# Allegro board JN516X_0V1_5x5.brd
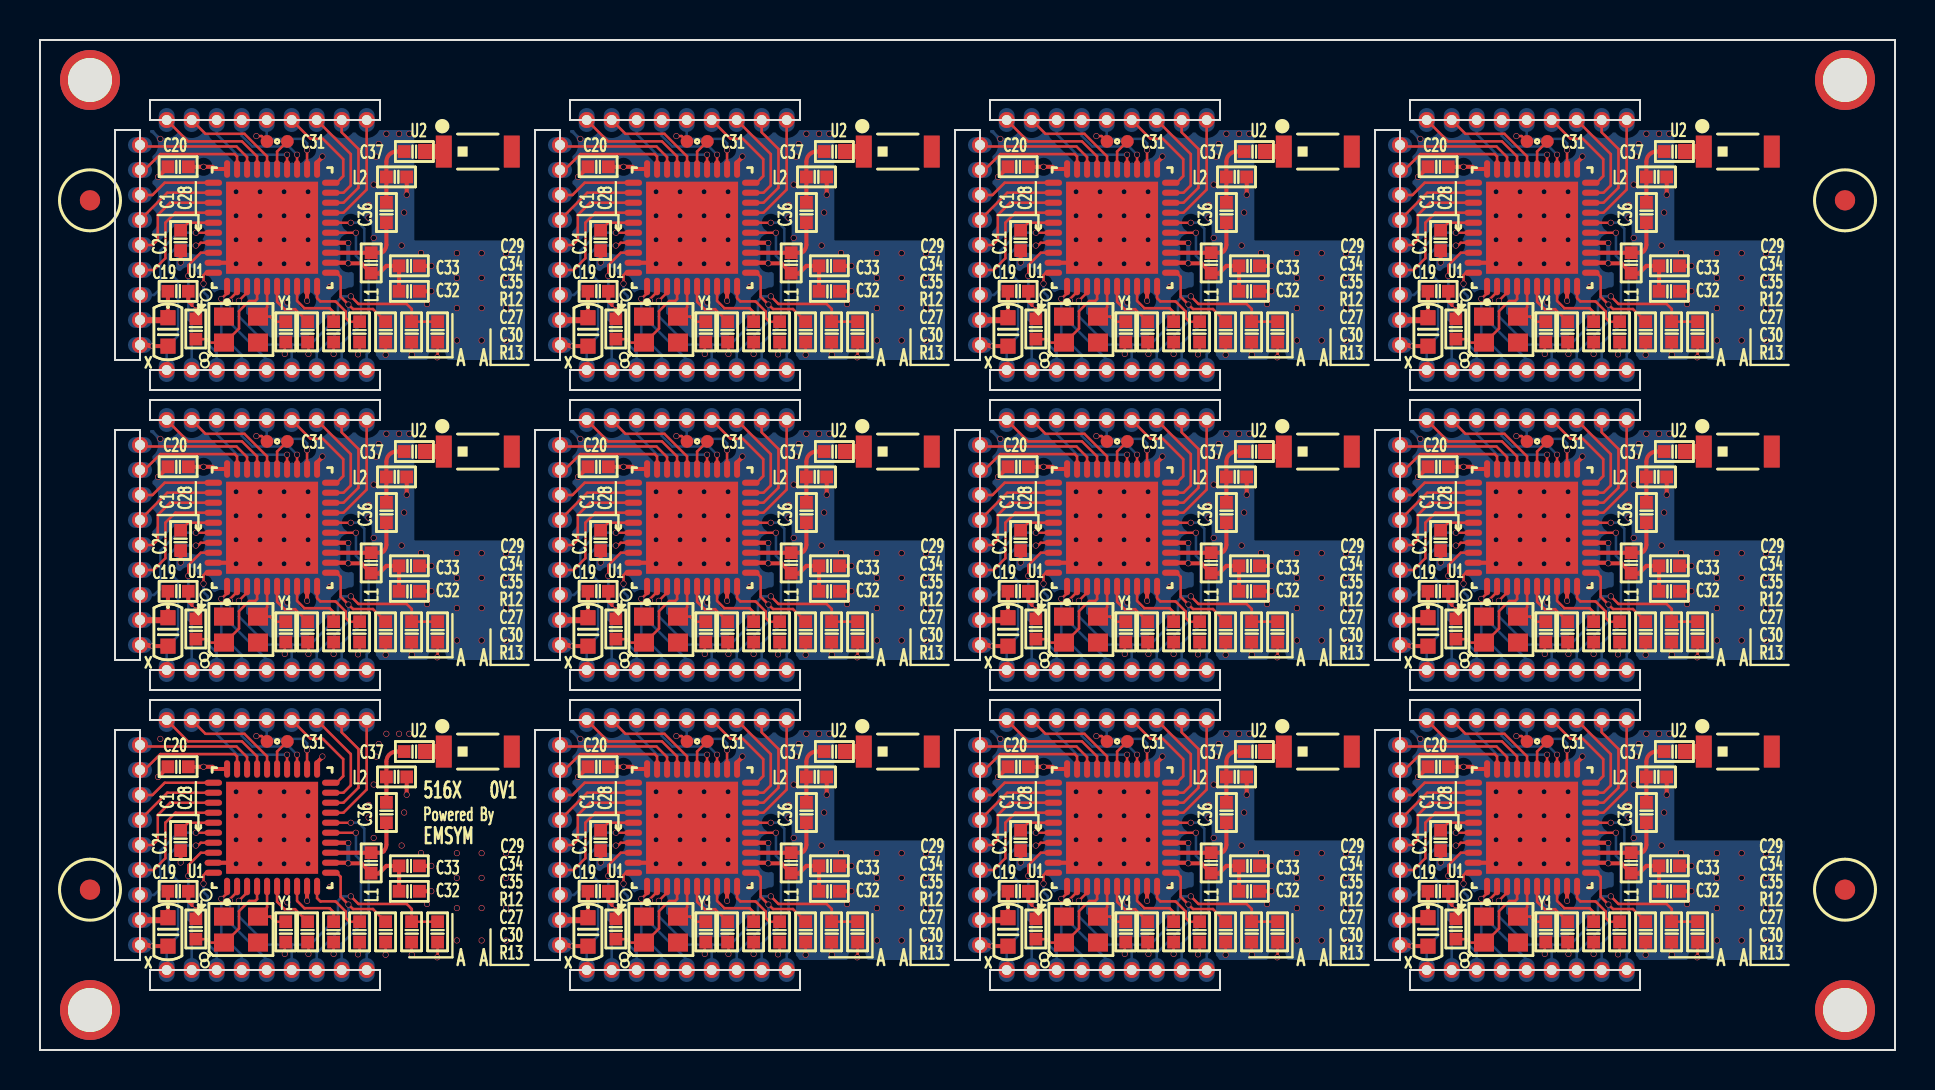
[diagram p0: board, top side]
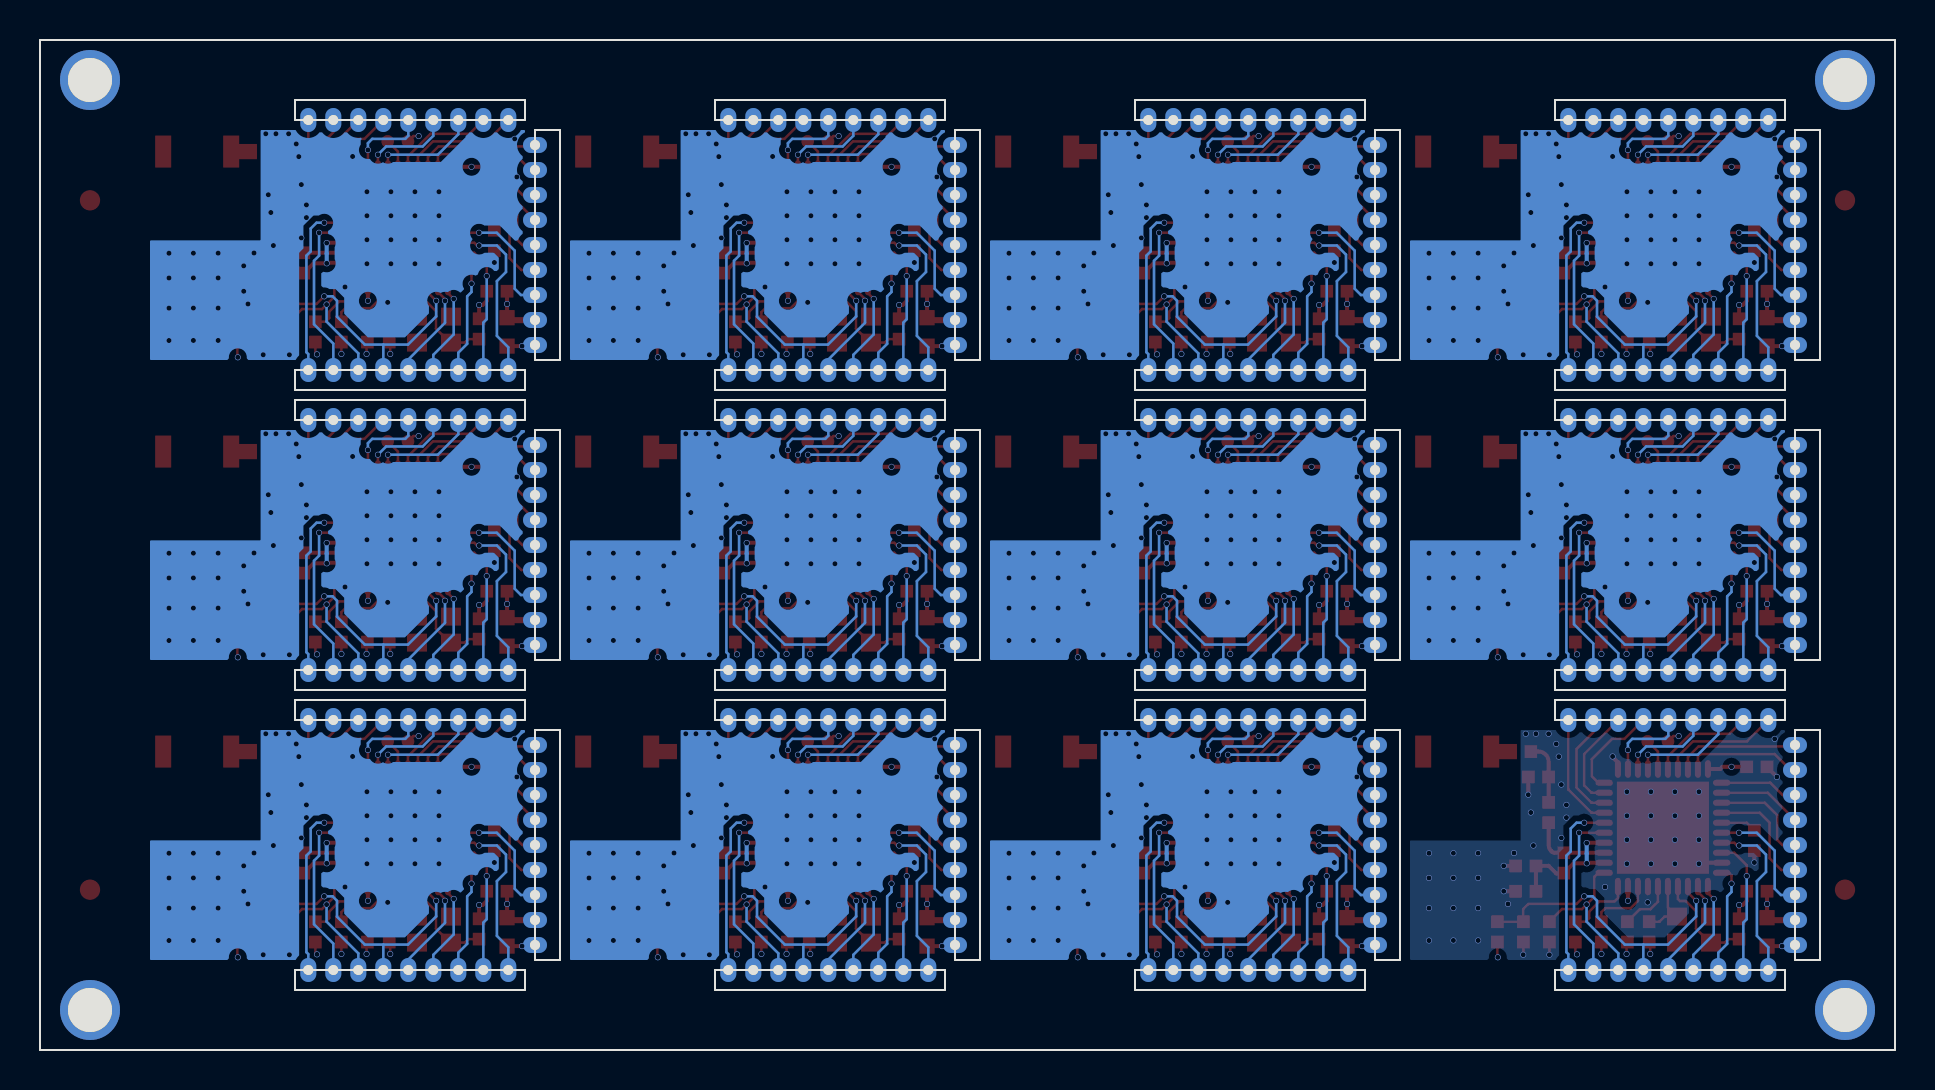
[diagram p1: board, bottom side, seen from below]

Outline 92.75 x 50.5 mm; copper layers: TOP, GND, VCC, BOTTOM. Coordinates in mm from the lower left corner of the outline.
Outline path: 0,50.5 92.75,50.5 92.75,0 0,0 0,50.5 ; 3.75,46 5,46 5,34.5 3.75,34.5 3.75,46 ; 3.75,31 5,31 5,19.5 3.75,19.5 3.75,31 ; 3.75,16 5,16 5,4.5 3.75,4.5 3.75,16 ; 5.5,47.5 5.5,46.5 17,46.5 17,47.5 5.5,47.5 ; 5.5,34 5.5,33 17,33 17,34 5.5,34 ; 5.5,32.5 5.5,31.5 17,31.5 17,32.5 5.5,32.5 ; 5.5,19 5.5,18 17,18 17,19 5.5,19 ; 5.5,17.5 5.5,16.5 17,16.5 17,17.5 5.5,17.5 ; 5.5,4 5.5,3 17,3 17,4 5.5,4 ; 24.75,46 26,46 26,34.5 24.75,34.5 24.75,46 ; 24.75,31 26,31 26,19.5 24.75,19.5 24.75,31 ; 24.75,16 26,16 26,4.5 24.75,4.5 24.75,16 ; 26.5,47.5 26.5,46.5 38,46.5 38,47.5 26.5,47.5 ; 26.5,34 26.5,33 38,33 38,34 26.5,34 ; 26.5,32.5 26.5,31.5 38,31.5 38,32.5 26.5,32.5 ; 26.5,19 26.5,18 38,18 38,19 26.5,19 ; 26.5,17.5 26.5,16.5 38,16.5 38,17.5 26.5,17.5 ; 26.5,4 26.5,3 38,3 38,4 26.5,4 ; 45.75,46 47,46 47,34.5 45.75,34.5 45.75,46 ; 45.75,31 47,31 47,19.5 45.75,19.5 45.75,31 ; 45.75,16 47,16 47,4.5 45.75,4.5 45.75,16 ; 47.5,47.5 47.5,46.5 59,46.5 59,47.5 47.5,47.5 ; 47.5,34 47.5,33 59,33 59,34 47.5,34 ; 47.5,32.5 47.5,31.5 59,31.5 59,32.5 47.5,32.5 ; 47.5,19 47.5,18 59,18 59,19 47.5,19 ; 47.5,17.5 47.5,16.5 59,16.5 59,17.5 47.5,17.5 ; 47.5,4 47.5,3 59,3 59,4 47.5,4 ; 66.75,46 68,46 68,34.5 66.75,34.5 66.75,46 ; 66.75,31 68,31 68,19.5 66.75,19.5 66.75,31 ; 66.75,16 68,16 68,4.5 66.75,4.5 66.75,16 ; 68.5,47.5 68.5,46.5 80,46.5 80,47.5 68.5,47.5 ; 68.5,34 68.5,33 80,33 80,34 68.5,34 ; 68.5,32.5 68.5,31.5 80,31.5 80,32.5 68.5,32.5 ; 68.5,19 68.5,18 80,18 80,19 68.5,19 ; 68.5,17.5 68.5,16.5 80,16.5 80,17.5 68.5,17.5 ; 68.5,4 68.5,3 80,3 80,4 68.5,4

## Design rules (mm)
constraint set DEFAULT: min track width 0.127, pair gap 0.127

## Placement (name value [footprint] x y rotation side)
1_J1  CON1  [HALF_DRILL_0R8_0R8]  33.58 4 0 top
1_J2  CON1  [HALF_DRILL_0R8_0R8]  36.08 4 0 top
1_J3  CON1  [HALF_DRILL_0R8_0R8]  34.83 4 0 top
1_J4  CON1  [HALF_DRILL_0R8_0R8]  29.83 16.5 0 top
1_J5  CON1  [HALF_DRILL_0R8_0R8]  31.08 16.5 0 top
1_J6  CON1  [HALF_DRILL_0R8_0R8]  32.33 4 0 top
1_J7  CON1  [HALF_DRILL_0R8_0R8]  31.08 4 0 top
1_J8  CON1  [HALF_DRILL_0R8_0R8]  29.83 4 0 top
1_J9  CON1  [HALF_DRILL_0R8_0R8]  28.58 4 0 top
1_J10  CON1  [HALF_DRILL_0R8_0R8]  27.33 4 0 top
1_J11  CON1  [HALF_DRILL_0R8_0R8]  26 7.75 90 top
1_J12  CON1  [HALF_DRILL_0R8_0R8]  26 9 90 top
1_J13  CON1  [HALF_DRILL_0R8_0R8]  26 10.25 90 top
1_J14  CON1  [HALF_DRILL_0R8_0R8]  26 11.5 90 top
1_J15  CON1  [HALF_DRILL_0R8_0R8]  26 12.75 90 top
1_J16  CON1  [HALF_DRILL_0R8_0R8]  26 14 90 top
1_J17  CON1  [HALF_DRILL_0R8_0R8]  26 15.25 90 top
1_J18  CON1  [HALF_DRILL_0R8_0R8]  27.33 16.5 0 top
1_J19  CON1  [HALF_DRILL_0R8_0R8]  28.58 16.5 0 top
1_J20  CON1  [HALF_DRILL_0R8_0R8]  34.83 16.5 0 top
1_J21  CON1  [HALF_DRILL_0R8_0R8]  36.08 16.5 0 top
1_J22  CON1  [HALF_DRILL_0R8_0R8]  37.33 16.5 0 top
1_J23  CON1  [HALF_DRILL_0R8_0R8]  37.33 4 0 top
1_J24  CON1  [HALF_DRILL_0R8_0R8]  33.58 16.5 0 top
1_J25  CON1  [HALF_DRILL_0R8_0R8]  32.33 16.5 0 top
1_J26  CON1  [HALF_DRILL_0R8_0R8]  26 6.5 90 top
1_J27  CON1  [HALF_DRILL_0R8_0R8]  26 5.25 90 top
2_J1  CON1  [HALF_DRILL_0R8_0R8]  54.58 4 0 top
2_J2  CON1  [HALF_DRILL_0R8_0R8]  57.08 4 0 top
2_J3  CON1  [HALF_DRILL_0R8_0R8]  55.83 4 0 top
2_J4  CON1  [HALF_DRILL_0R8_0R8]  50.83 16.5 0 top
2_J5  CON1  [HALF_DRILL_0R8_0R8]  52.08 16.5 0 top
2_J6  CON1  [HALF_DRILL_0R8_0R8]  53.33 4 0 top
2_J7  CON1  [HALF_DRILL_0R8_0R8]  52.08 4 0 top
2_J8  CON1  [HALF_DRILL_0R8_0R8]  50.83 4 0 top
2_J9  CON1  [HALF_DRILL_0R8_0R8]  49.58 4 0 top
2_J10  CON1  [HALF_DRILL_0R8_0R8]  48.33 4 0 top
2_J11  CON1  [HALF_DRILL_0R8_0R8]  47 7.75 90 top
2_J12  CON1  [HALF_DRILL_0R8_0R8]  47 9 90 top
2_J13  CON1  [HALF_DRILL_0R8_0R8]  47 10.25 90 top
2_J14  CON1  [HALF_DRILL_0R8_0R8]  47 11.5 90 top
2_J15  CON1  [HALF_DRILL_0R8_0R8]  47 12.75 90 top
2_J16  CON1  [HALF_DRILL_0R8_0R8]  47 14 90 top
2_J17  CON1  [HALF_DRILL_0R8_0R8]  47 15.25 90 top
2_J18  CON1  [HALF_DRILL_0R8_0R8]  48.33 16.5 0 top
2_J19  CON1  [HALF_DRILL_0R8_0R8]  49.58 16.5 0 top
2_J20  CON1  [HALF_DRILL_0R8_0R8]  55.83 16.5 0 top
2_J21  CON1  [HALF_DRILL_0R8_0R8]  57.08 16.5 0 top
2_J22  CON1  [HALF_DRILL_0R8_0R8]  58.33 16.5 0 top
2_J23  CON1  [HALF_DRILL_0R8_0R8]  58.33 4 0 top
2_J24  CON1  [HALF_DRILL_0R8_0R8]  54.58 16.5 0 top
2_J25  CON1  [HALF_DRILL_0R8_0R8]  53.33 16.5 0 top
2_J26  CON1  [HALF_DRILL_0R8_0R8]  47 6.5 90 top
2_J27  CON1  [HALF_DRILL_0R8_0R8]  47 5.25 90 top
3_J1  CON1  [HALF_DRILL_0R8_0R8]  75.58 4 0 top
3_J2  CON1  [HALF_DRILL_0R8_0R8]  78.08 4 0 top
3_J3  CON1  [HALF_DRILL_0R8_0R8]  76.83 4 0 top
3_J4  CON1  [HALF_DRILL_0R8_0R8]  71.83 16.5 0 top
3_J5  CON1  [HALF_DRILL_0R8_0R8]  73.08 16.5 0 top
3_J6  CON1  [HALF_DRILL_0R8_0R8]  74.33 4 0 top
3_J7  CON1  [HALF_DRILL_0R8_0R8]  73.08 4 0 top
3_J8  CON1  [HALF_DRILL_0R8_0R8]  71.83 4 0 top
3_J9  CON1  [HALF_DRILL_0R8_0R8]  70.58 4 0 top
3_J10  CON1  [HALF_DRILL_0R8_0R8]  69.33 4 0 top
3_J11  CON1  [HALF_DRILL_0R8_0R8]  68 7.75 90 top
3_J12  CON1  [HALF_DRILL_0R8_0R8]  68 9 90 top
3_J13  CON1  [HALF_DRILL_0R8_0R8]  68 10.25 90 top
3_J14  CON1  [HALF_DRILL_0R8_0R8]  68 11.5 90 top
3_J15  CON1  [HALF_DRILL_0R8_0R8]  68 12.75 90 top
3_J16  CON1  [HALF_DRILL_0R8_0R8]  68 14 90 top
3_J17  CON1  [HALF_DRILL_0R8_0R8]  68 15.25 90 top
3_J18  CON1  [HALF_DRILL_0R8_0R8]  69.33 16.5 0 top
3_J19  CON1  [HALF_DRILL_0R8_0R8]  70.58 16.5 0 top
3_J20  CON1  [HALF_DRILL_0R8_0R8]  76.83 16.5 0 top
3_J21  CON1  [HALF_DRILL_0R8_0R8]  78.08 16.5 0 top
3_J22  CON1  [HALF_DRILL_0R8_0R8]  79.33 16.5 0 top
3_J23  CON1  [HALF_DRILL_0R8_0R8]  79.33 4 0 top
3_J24  CON1  [HALF_DRILL_0R8_0R8]  75.58 16.5 0 top
3_J25  CON1  [HALF_DRILL_0R8_0R8]  74.33 16.5 0 top
3_J26  CON1  [HALF_DRILL_0R8_0R8]  68 6.5 90 top
3_J27  CON1  [HALF_DRILL_0R8_0R8]  68 5.25 90 top
4_J1  CON1  [HALF_DRILL_0R8_0R8]  33.58 19 0 top
4_J2  CON1  [HALF_DRILL_0R8_0R8]  36.08 19 0 top
4_J3  CON1  [HALF_DRILL_0R8_0R8]  34.83 19 0 top
4_J4  CON1  [HALF_DRILL_0R8_0R8]  29.83 31.5 0 top
4_J5  CON1  [HALF_DRILL_0R8_0R8]  31.08 31.5 0 top
4_J6  CON1  [HALF_DRILL_0R8_0R8]  32.33 19 0 top
4_J7  CON1  [HALF_DRILL_0R8_0R8]  31.08 19 0 top
4_J8  CON1  [HALF_DRILL_0R8_0R8]  29.83 19 0 top
4_J9  CON1  [HALF_DRILL_0R8_0R8]  28.58 19 0 top
4_J10  CON1  [HALF_DRILL_0R8_0R8]  27.33 19 0 top
4_J11  CON1  [HALF_DRILL_0R8_0R8]  26 22.75 90 top
4_J12  CON1  [HALF_DRILL_0R8_0R8]  26 24 90 top
4_J13  CON1  [HALF_DRILL_0R8_0R8]  26 25.25 90 top
4_J14  CON1  [HALF_DRILL_0R8_0R8]  26 26.5 90 top
4_J15  CON1  [HALF_DRILL_0R8_0R8]  26 27.75 90 top
4_J16  CON1  [HALF_DRILL_0R8_0R8]  26 29 90 top
4_J17  CON1  [HALF_DRILL_0R8_0R8]  26 30.25 90 top
4_J18  CON1  [HALF_DRILL_0R8_0R8]  27.33 31.5 0 top
4_J19  CON1  [HALF_DRILL_0R8_0R8]  28.58 31.5 0 top
4_J20  CON1  [HALF_DRILL_0R8_0R8]  34.83 31.5 0 top
4_J21  CON1  [HALF_DRILL_0R8_0R8]  36.08 31.5 0 top
4_J22  CON1  [HALF_DRILL_0R8_0R8]  37.33 31.5 0 top
4_J23  CON1  [HALF_DRILL_0R8_0R8]  37.33 19 0 top
4_J24  CON1  [HALF_DRILL_0R8_0R8]  33.58 31.5 0 top
4_J25  CON1  [HALF_DRILL_0R8_0R8]  32.33 31.5 0 top
4_J26  CON1  [HALF_DRILL_0R8_0R8]  26 21.5 90 top
4_J27  CON1  [HALF_DRILL_0R8_0R8]  26 20.25 90 top
5_J1  CON1  [HALF_DRILL_0R8_0R8]  12.58 19 0 top
5_J2  CON1  [HALF_DRILL_0R8_0R8]  15.08 19 0 top
5_J3  CON1  [HALF_DRILL_0R8_0R8]  13.83 19 0 top
5_J4  CON1  [HALF_DRILL_0R8_0R8]  8.83 31.5 0 top
5_J5  CON1  [HALF_DRILL_0R8_0R8]  10.08 31.5 0 top
5_J6  CON1  [HALF_DRILL_0R8_0R8]  11.33 19 0 top
5_J7  CON1  [HALF_DRILL_0R8_0R8]  10.08 19 0 top
5_J8  CON1  [HALF_DRILL_0R8_0R8]  8.83 19 0 top
5_J9  CON1  [HALF_DRILL_0R8_0R8]  7.58 19 0 top
5_J10  CON1  [HALF_DRILL_0R8_0R8]  6.33 19 0 top
5_J11  CON1  [HALF_DRILL_0R8_0R8]  5 22.75 90 top
5_J12  CON1  [HALF_DRILL_0R8_0R8]  5 24 90 top
5_J13  CON1  [HALF_DRILL_0R8_0R8]  5 25.25 90 top
5_J14  CON1  [HALF_DRILL_0R8_0R8]  5 26.5 90 top
5_J15  CON1  [HALF_DRILL_0R8_0R8]  5 27.75 90 top
5_J16  CON1  [HALF_DRILL_0R8_0R8]  5 29 90 top
5_J17  CON1  [HALF_DRILL_0R8_0R8]  5 30.25 90 top
5_J18  CON1  [HALF_DRILL_0R8_0R8]  6.33 31.5 0 top
5_J19  CON1  [HALF_DRILL_0R8_0R8]  7.58 31.5 0 top
5_J20  CON1  [HALF_DRILL_0R8_0R8]  13.83 31.5 0 top
5_J21  CON1  [HALF_DRILL_0R8_0R8]  15.08 31.5 0 top
5_J22  CON1  [HALF_DRILL_0R8_0R8]  16.33 31.5 0 top
5_J23  CON1  [HALF_DRILL_0R8_0R8]  16.33 19 0 top
5_J24  CON1  [HALF_DRILL_0R8_0R8]  12.58 31.5 0 top
5_J25  CON1  [HALF_DRILL_0R8_0R8]  11.33 31.5 0 top
5_J26  CON1  [HALF_DRILL_0R8_0R8]  5 21.5 90 top
5_J27  CON1  [HALF_DRILL_0R8_0R8]  5 20.25 90 top
6_J1  CON1  [HALF_DRILL_0R8_0R8]  54.58 19 0 top
6_J2  CON1  [HALF_DRILL_0R8_0R8]  57.08 19 0 top
6_J3  CON1  [HALF_DRILL_0R8_0R8]  55.83 19 0 top
6_J4  CON1  [HALF_DRILL_0R8_0R8]  50.83 31.5 0 top
6_J5  CON1  [HALF_DRILL_0R8_0R8]  52.08 31.5 0 top
6_J6  CON1  [HALF_DRILL_0R8_0R8]  53.33 19 0 top
6_J7  CON1  [HALF_DRILL_0R8_0R8]  52.08 19 0 top
6_J8  CON1  [HALF_DRILL_0R8_0R8]  50.83 19 0 top
6_J9  CON1  [HALF_DRILL_0R8_0R8]  49.58 19 0 top
6_J10  CON1  [HALF_DRILL_0R8_0R8]  48.33 19 0 top
6_J11  CON1  [HALF_DRILL_0R8_0R8]  47 22.75 90 top
6_J12  CON1  [HALF_DRILL_0R8_0R8]  47 24 90 top
6_J13  CON1  [HALF_DRILL_0R8_0R8]  47 25.25 90 top
6_J14  CON1  [HALF_DRILL_0R8_0R8]  47 26.5 90 top
6_J15  CON1  [HALF_DRILL_0R8_0R8]  47 27.75 90 top
6_J16  CON1  [HALF_DRILL_0R8_0R8]  47 29 90 top
6_J17  CON1  [HALF_DRILL_0R8_0R8]  47 30.25 90 top
6_J18  CON1  [HALF_DRILL_0R8_0R8]  48.33 31.5 0 top
6_J19  CON1  [HALF_DRILL_0R8_0R8]  49.58 31.5 0 top
6_J20  CON1  [HALF_DRILL_0R8_0R8]  55.83 31.5 0 top
6_J21  CON1  [HALF_DRILL_0R8_0R8]  57.08 31.5 0 top
6_J22  CON1  [HALF_DRILL_0R8_0R8]  58.33 31.5 0 top
6_J23  CON1  [HALF_DRILL_0R8_0R8]  58.33 19 0 top
6_J24  CON1  [HALF_DRILL_0R8_0R8]  54.58 31.5 0 top
6_J25  CON1  [HALF_DRILL_0R8_0R8]  53.33 31.5 0 top
6_J26  CON1  [HALF_DRILL_0R8_0R8]  47 21.5 90 top
6_J27  CON1  [HALF_DRILL_0R8_0R8]  47 20.25 90 top
7_J1  CON1  [HALF_DRILL_0R8_0R8]  75.58 19 0 top
7_J2  CON1  [HALF_DRILL_0R8_0R8]  78.08 19 0 top
7_J3  CON1  [HALF_DRILL_0R8_0R8]  76.83 19 0 top
7_J4  CON1  [HALF_DRILL_0R8_0R8]  71.83 31.5 0 top
7_J5  CON1  [HALF_DRILL_0R8_0R8]  73.08 31.5 0 top
7_J6  CON1  [HALF_DRILL_0R8_0R8]  74.33 19 0 top
7_J7  CON1  [HALF_DRILL_0R8_0R8]  73.08 19 0 top
7_J8  CON1  [HALF_DRILL_0R8_0R8]  71.83 19 0 top
7_J9  CON1  [HALF_DRILL_0R8_0R8]  70.58 19 0 top
7_J10  CON1  [HALF_DRILL_0R8_0R8]  69.33 19 0 top
7_J11  CON1  [HALF_DRILL_0R8_0R8]  68 22.75 90 top
7_J12  CON1  [HALF_DRILL_0R8_0R8]  68 24 90 top
7_J13  CON1  [HALF_DRILL_0R8_0R8]  68 25.25 90 top
7_J14  CON1  [HALF_DRILL_0R8_0R8]  68 26.5 90 top
7_J15  CON1  [HALF_DRILL_0R8_0R8]  68 27.75 90 top
7_J16  CON1  [HALF_DRILL_0R8_0R8]  68 29 90 top
7_J17  CON1  [HALF_DRILL_0R8_0R8]  68 30.25 90 top
7_J18  CON1  [HALF_DRILL_0R8_0R8]  69.33 31.5 0 top
7_J19  CON1  [HALF_DRILL_0R8_0R8]  70.58 31.5 0 top
7_J20  CON1  [HALF_DRILL_0R8_0R8]  76.83 31.5 0 top
7_J21  CON1  [HALF_DRILL_0R8_0R8]  78.08 31.5 0 top
7_J22  CON1  [HALF_DRILL_0R8_0R8]  79.33 31.5 0 top
7_J23  CON1  [HALF_DRILL_0R8_0R8]  79.33 19 0 top
7_J24  CON1  [HALF_DRILL_0R8_0R8]  75.58 31.5 0 top
7_J25  CON1  [HALF_DRILL_0R8_0R8]  74.33 31.5 0 top
7_J26  CON1  [HALF_DRILL_0R8_0R8]  68 21.5 90 top
7_J27  CON1  [HALF_DRILL_0R8_0R8]  68 20.25 90 top
8_J1  CON1  [HALF_DRILL_0R8_0R8]  12.58 34 0 top
8_J2  CON1  [HALF_DRILL_0R8_0R8]  15.08 34 0 top
8_J3  CON1  [HALF_DRILL_0R8_0R8]  13.83 34 0 top
8_J4  CON1  [HALF_DRILL_0R8_0R8]  8.83 46.5 0 top
8_J5  CON1  [HALF_DRILL_0R8_0R8]  10.08 46.5 0 top
8_J6  CON1  [HALF_DRILL_0R8_0R8]  11.33 34 0 top
8_J7  CON1  [HALF_DRILL_0R8_0R8]  10.08 34 0 top
8_J8  CON1  [HALF_DRILL_0R8_0R8]  8.83 34 0 top
8_J9  CON1  [HALF_DRILL_0R8_0R8]  7.58 34 0 top
8_J10  CON1  [HALF_DRILL_0R8_0R8]  6.33 34 0 top
8_J11  CON1  [HALF_DRILL_0R8_0R8]  5 37.75 90 top
8_J12  CON1  [HALF_DRILL_0R8_0R8]  5 39 90 top
8_J13  CON1  [HALF_DRILL_0R8_0R8]  5 40.25 90 top
8_J14  CON1  [HALF_DRILL_0R8_0R8]  5 41.5 90 top
8_J15  CON1  [HALF_DRILL_0R8_0R8]  5 42.75 90 top
8_J16  CON1  [HALF_DRILL_0R8_0R8]  5 44 90 top
8_J17  CON1  [HALF_DRILL_0R8_0R8]  5 45.25 90 top
8_J18  CON1  [HALF_DRILL_0R8_0R8]  6.33 46.5 0 top
8_J19  CON1  [HALF_DRILL_0R8_0R8]  7.58 46.5 0 top
8_J20  CON1  [HALF_DRILL_0R8_0R8]  13.83 46.5 0 top
8_J21  CON1  [HALF_DRILL_0R8_0R8]  15.08 46.5 0 top
8_J22  CON1  [HALF_DRILL_0R8_0R8]  16.33 46.5 0 top
8_J23  CON1  [HALF_DRILL_0R8_0R8]  16.33 34 0 top
8_J24  CON1  [HALF_DRILL_0R8_0R8]  12.58 46.5 0 top
8_J25  CON1  [HALF_DRILL_0R8_0R8]  11.33 46.5 0 top
8_J26  CON1  [HALF_DRILL_0R8_0R8]  5 36.5 90 top
8_J27  CON1  [HALF_DRILL_0R8_0R8]  5 35.25 90 top
9_J1  CON1  [HALF_DRILL_0R8_0R8]  33.58 34 0 top
9_J2  CON1  [HALF_DRILL_0R8_0R8]  36.08 34 0 top
9_J3  CON1  [HALF_DRILL_0R8_0R8]  34.83 34 0 top
9_J4  CON1  [HALF_DRILL_0R8_0R8]  29.83 46.5 0 top
9_J5  CON1  [HALF_DRILL_0R8_0R8]  31.08 46.5 0 top
9_J6  CON1  [HALF_DRILL_0R8_0R8]  32.33 34 0 top
9_J7  CON1  [HALF_DRILL_0R8_0R8]  31.08 34 0 top
9_J8  CON1  [HALF_DRILL_0R8_0R8]  29.83 34 0 top
9_J9  CON1  [HALF_DRILL_0R8_0R8]  28.58 34 0 top
9_J10  CON1  [HALF_DRILL_0R8_0R8]  27.33 34 0 top
9_J11  CON1  [HALF_DRILL_0R8_0R8]  26 37.75 90 top
9_J12  CON1  [HALF_DRILL_0R8_0R8]  26 39 90 top
9_J13  CON1  [HALF_DRILL_0R8_0R8]  26 40.25 90 top
9_J14  CON1  [HALF_DRILL_0R8_0R8]  26 41.5 90 top
9_J15  CON1  [HALF_DRILL_0R8_0R8]  26 42.75 90 top
9_J16  CON1  [HALF_DRILL_0R8_0R8]  26 44 90 top
9_J17  CON1  [HALF_DRILL_0R8_0R8]  26 45.25 90 top
9_J18  CON1  [HALF_DRILL_0R8_0R8]  27.33 46.5 0 top
9_J19  CON1  [HALF_DRILL_0R8_0R8]  28.58 46.5 0 top
9_J20  CON1  [HALF_DRILL_0R8_0R8]  34.83 46.5 0 top
9_J21  CON1  [HALF_DRILL_0R8_0R8]  36.08 46.5 0 top
9_J22  CON1  [HALF_DRILL_0R8_0R8]  37.33 46.5 0 top
9_J23  CON1  [HALF_DRILL_0R8_0R8]  37.33 34 0 top
9_J24  CON1  [HALF_DRILL_0R8_0R8]  33.58 46.5 0 top
9_J25  CON1  [HALF_DRILL_0R8_0R8]  32.33 46.5 0 top
9_J26  CON1  [HALF_DRILL_0R8_0R8]  26 36.5 90 top
9_J27  CON1  [HALF_DRILL_0R8_0R8]  26 35.25 90 top
10_J1  CON1  [HALF_DRILL_0R8_0R8]  54.58 34 0 top
10_J2  CON1  [HALF_DRILL_0R8_0R8]  57.08 34 0 top
10_J3  CON1  [HALF_DRILL_0R8_0R8]  55.83 34 0 top
10_J4  CON1  [HALF_DRILL_0R8_0R8]  50.83 46.5 0 top
10_J5  CON1  [HALF_DRILL_0R8_0R8]  52.08 46.5 0 top
10_J6  CON1  [HALF_DRILL_0R8_0R8]  53.33 34 0 top
10_J7  CON1  [HALF_DRILL_0R8_0R8]  52.08 34 0 top
10_J8  CON1  [HALF_DRILL_0R8_0R8]  50.83 34 0 top
10_J9  CON1  [HALF_DRILL_0R8_0R8]  49.58 34 0 top
10_J10  CON1  [HALF_DRILL_0R8_0R8]  48.33 34 0 top
10_J11  CON1  [HALF_DRILL_0R8_0R8]  47 37.75 90 top
10_J12  CON1  [HALF_DRILL_0R8_0R8]  47 39 90 top
10_J13  CON1  [HALF_DRILL_0R8_0R8]  47 40.25 90 top
10_J14  CON1  [HALF_DRILL_0R8_0R8]  47 41.5 90 top
10_J15  CON1  [HALF_DRILL_0R8_0R8]  47 42.75 90 top
10_J16  CON1  [HALF_DRILL_0R8_0R8]  47 44 90 top
10_J17  CON1  [HALF_DRILL_0R8_0R8]  47 45.25 90 top
10_J18  CON1  [HALF_DRILL_0R8_0R8]  48.33 46.5 0 top
10_J19  CON1  [HALF_DRILL_0R8_0R8]  49.58 46.5 0 top
10_J20  CON1  [HALF_DRILL_0R8_0R8]  55.83 46.5 0 top
10_J21  CON1  [HALF_DRILL_0R8_0R8]  57.08 46.5 0 top
10_J22  CON1  [HALF_DRILL_0R8_0R8]  58.33 46.5 0 top
10_J23  CON1  [HALF_DRILL_0R8_0R8]  58.33 34 0 top
10_J24  CON1  [HALF_DRILL_0R8_0R8]  54.58 46.5 0 top
10_J25  CON1  [HALF_DRILL_0R8_0R8]  53.33 46.5 0 top
10_J26  CON1  [HALF_DRILL_0R8_0R8]  47 36.5 90 top
10_J27  CON1  [HALF_DRILL_0R8_0R8]  47 35.25 90 top
11_J1  CON1  [HALF_DRILL_0R8_0R8]  75.58 34 0 top
11_J2  CON1  [HALF_DRILL_0R8_0R8]  78.08 34 0 top
11_J3  CON1  [HALF_DRILL_0R8_0R8]  76.83 34 0 top
11_J4  CON1  [HALF_DRILL_0R8_0R8]  71.83 46.5 0 top
11_J5  CON1  [HALF_DRILL_0R8_0R8]  73.08 46.5 0 top
11_J6  CON1  [HALF_DRILL_0R8_0R8]  74.33 34 0 top
11_J7  CON1  [HALF_DRILL_0R8_0R8]  73.08 34 0 top
11_J8  CON1  [HALF_DRILL_0R8_0R8]  71.83 34 0 top
11_J9  CON1  [HALF_DRILL_0R8_0R8]  70.58 34 0 top
11_J10  CON1  [HALF_DRILL_0R8_0R8]  69.33 34 0 top
11_J11  CON1  [HALF_DRILL_0R8_0R8]  68 37.75 90 top
11_J12  CON1  [HALF_DRILL_0R8_0R8]  68 39 90 top
11_J13  CON1  [HALF_DRILL_0R8_0R8]  68 40.25 90 top
11_J14  CON1  [HALF_DRILL_0R8_0R8]  68 41.5 90 top
11_J15  CON1  [HALF_DRILL_0R8_0R8]  68 42.75 90 top
11_J16  CON1  [HALF_DRILL_0R8_0R8]  68 44 90 top
11_J17  CON1  [HALF_DRILL_0R8_0R8]  68 45.25 90 top
11_J18  CON1  [HALF_DRILL_0R8_0R8]  69.33 46.5 0 top
11_J19  CON1  [HALF_DRILL_0R8_0R8]  70.58 46.5 0 top
11_J20  CON1  [HALF_DRILL_0R8_0R8]  76.83 46.5 0 top
11_J21  CON1  [HALF_DRILL_0R8_0R8]  78.08 46.5 0 top
11_J22  CON1  [HALF_DRILL_0R8_0R8]  79.33 46.5 0 top
11_J23  CON1  [HALF_DRILL_0R8_0R8]  79.33 34 0 top
11_J24  CON1  [HALF_DRILL_0R8_0R8]  75.58 46.5 0 top
11_J25  CON1  [HALF_DRILL_0R8_0R8]  74.33 46.5 0 top
11_J26  CON1  [HALF_DRILL_0R8_0R8]  68 36.5 90 top
11_J27  CON1  [HALF_DRILL_0R8_0R8]  68 35.25 90 top
C1  226  [C0603]  6.4 5.91 270 top
C19  104  [C0402]  6.91 7.94 0 top
C20  104  [C0402]  6.91 14.16 180 top
C21  104  [C0402]  7.03 10.48 90 top
C27  104  [C0402]  17.28 5.91 270 top
C28  103  [C0402]  7.79 6.05 90 top
C29  103  [C0402]  12.29 5.91 270 top
C30  474  [C0402]  18.58 5.91 270 top
C31  104  [C402_25]  11.86 15.43 0 top
C32  104  [C0402]  18.46 7.94 180 top
C33  470  [C0402]  18.46 9.21 180 top
C34  104  [C0402]  13.38 5.91 90 top
C35  104  [C0402]  14.68 5.91 90 top
C36  470  [C0402]  17.32 11.87 270 top
C37  470  [C0402]  17.83 13.65 0 top
J1  CON1  [HALF_DRILL_0R8_0R8]  12.58 4 0 top
J2  CON1  [HALF_DRILL_0R8_0R8]  15.08 4 0 top
J3  CON1  [HALF_DRILL_0R8_0R8]  13.83 4 0 top
J4  CON1  [HALF_DRILL_0R8_0R8]  8.83 16.5 0 top
J5  CON1  [HALF_DRILL_0R8_0R8]  10.08 16.5 0 top
J6  CON1  [HALF_DRILL_0R8_0R8]  11.33 4 0 top
J7  CON1  [HALF_DRILL_0R8_0R8]  10.08 4 0 top
J8  CON1  [HALF_DRILL_0R8_0R8]  8.83 4 0 top
J9  CON1  [HALF_DRILL_0R8_0R8]  7.58 4 0 top
J10  CON1  [HALF_DRILL_0R8_0R8]  6.33 4 0 top
J11  CON1  [HALF_DRILL_0R8_0R8]  5 7.75 90 top
J12  CON1  [HALF_DRILL_0R8_0R8]  5 9 90 top
J13  CON1  [HALF_DRILL_0R8_0R8]  5 10.25 90 top
J14  CON1  [HALF_DRILL_0R8_0R8]  5 11.5 90 top
J15  CON1  [HALF_DRILL_0R8_0R8]  5 12.75 90 top
J16  CON1  [HALF_DRILL_0R8_0R8]  5 14 90 top
J17  CON1  [HALF_DRILL_0R8_0R8]  5 15.25 90 top
J18  CON1  [HALF_DRILL_0R8_0R8]  6.33 16.5 0 top
J19  CON1  [HALF_DRILL_0R8_0R8]  7.58 16.5 0 top
J20  CON1  [HALF_DRILL_0R8_0R8]  13.83 16.5 0 top
J21  CON1  [HALF_DRILL_0R8_0R8]  15.08 16.5 0 top
J22  CON1  [HALF_DRILL_0R8_0R8]  16.33 16.5 0 top
J23  CON1  [HALF_DRILL_0R8_0R8]  16.33 4 0 top
J24  CON1  [HALF_DRILL_0R8_0R8]  12.58 16.5 0 top
J25  CON1  [HALF_DRILL_0R8_0R8]  11.33 16.5 0 top
J26  CON1  [HALF_DRILL_0R8_0R8]  5 6.5 90 top
J27  CON1  [HALF_DRILL_0R8_0R8]  5 5.25 90 top
L1  3.9nH  [L0402]  16.56 9.35 90 top
L2  5.1nH  [L0402]  18.72 14.92 180 top
M*  -  [unnamed]  90.25 8.02 0 top
M*#2  -  [unnamed]  90.25 42.48 0 top
M*#3  -  [unnamed]  2.5 42.48 0 top
M*#4  -  [unnamed]  2.5 8.02 0 top
NOREF  -  [unnamed#2]  2.5 48.5 0 top
NOREF#2  -  [unnamed#2]  2.5 2 0 top
NOREF#3  -  [unnamed#2]  90.25 48.5 0 top
NOREF#4  -  [#3]  92.75 0 90 top
NOREF#5  -  [#3]  0 0 0 top
NOREF#6  -  [unnamed#2]  90.25 2 0 top
R12  433  [R0402]  15.98 5.91 90 top
R13  183  [R0402]  19.88 5.91 90 top
U1  JN516X  [HVQFN40_6X6]  11.6 11.11 0 top
U2  RFANT3216120A5T  [ANT_3216-2PIN]  21.89 14.92 0 top
UNK1_C1  226  [C0603]  27.4 5.91 270 top
UNK1_C19  104  [C0402]  27.91 7.94 0 top
UNK1_C20  104  [C0402]  27.91 14.16 180 top
UNK1_C21  104  [C0402]  28.03 10.48 90 top
UNK1_C27  104  [C0402]  38.28 5.91 270 top
UNK1_C28  103  [C0402]  28.79 6.05 90 top
UNK1_C29  103  [C0402]  33.29 5.91 270 top
UNK1_C30  474  [C0402]  39.58 5.91 270 top
UNK1_C31  104  [C402_25]  32.86 15.43 0 top
UNK1_C32  104  [C0402]  39.46 7.94 180 top
UNK1_C33  470  [C0402]  39.46 9.21 180 top
UNK1_C34  104  [C0402]  34.38 5.91 90 top
UNK1_C35  104  [C0402]  35.68 5.91 90 top
UNK1_C36  470  [C0402]  38.32 11.87 270 top
UNK1_C37  470  [C0402]  38.83 13.65 0 top
UNK1_L1  3.9nH  [L0402]  37.56 9.35 90 top
UNK1_L2  5.1nH  [L0402]  39.72 14.92 180 top
UNK1_R12  433  [R0402]  36.98 5.91 90 top
UNK1_R13  183  [R0402]  40.88 5.91 90 top
UNK1_U1  JN516X  [HVQFN40_6X6]  32.6 11.11 0 top
UNK1_U2  RFANT3216120A5T  [ANT_3216-2PIN]  42.89 14.92 0 top
UNK1_Y1  32MHz  [OSC_SMD_2520]  31.05 6.02 0 top
UNK2_C1  226  [C0603]  48.4 5.91 270 top
UNK2_C19  104  [C0402]  48.91 7.94 0 top
UNK2_C20  104  [C0402]  48.91 14.16 180 top
UNK2_C21  104  [C0402]  49.03 10.48 90 top
UNK2_C27  104  [C0402]  59.28 5.91 270 top
UNK2_C28  103  [C0402]  49.79 6.05 90 top
UNK2_C29  103  [C0402]  54.29 5.91 270 top
UNK2_C30  474  [C0402]  60.58 5.91 270 top
UNK2_C31  104  [C402_25]  53.86 15.43 0 top
UNK2_C32  104  [C0402]  60.46 7.94 180 top
UNK2_C33  470  [C0402]  60.46 9.21 180 top
UNK2_C34  104  [C0402]  55.38 5.91 90 top
UNK2_C35  104  [C0402]  56.68 5.91 90 top
UNK2_C36  470  [C0402]  59.32 11.87 270 top
UNK2_C37  470  [C0402]  59.83 13.65 0 top
UNK2_L1  3.9nH  [L0402]  58.56 9.35 90 top
UNK2_L2  5.1nH  [L0402]  60.72 14.92 180 top
UNK2_R12  433  [R0402]  57.98 5.91 90 top
UNK2_R13  183  [R0402]  61.88 5.91 90 top
UNK2_U1  JN516X  [HVQFN40_6X6]  53.6 11.11 0 top
UNK2_U2  RFANT3216120A5T  [ANT_3216-2PIN]  63.89 14.92 0 top
UNK2_Y1  32MHz  [OSC_SMD_2520]  52.05 6.02 0 top
UNK3_C1  226  [C0603]  69.4 5.91 270 top
UNK3_C19  104  [C0402]  69.91 7.94 0 top
UNK3_C20  104  [C0402]  69.91 14.16 180 top
UNK3_C21  104  [C0402]  70.03 10.48 90 top
UNK3_C27  104  [C0402]  80.28 5.91 270 top
UNK3_C28  103  [C0402]  70.79 6.05 90 top
UNK3_C29  103  [C0402]  75.29 5.91 270 top
UNK3_C30  474  [C0402]  81.58 5.91 270 top
UNK3_C31  104  [C402_25]  74.86 15.43 0 top
UNK3_C32  104  [C0402]  81.46 7.94 180 top
UNK3_C33  470  [C0402]  81.46 9.21 180 top
UNK3_C34  104  [C0402]  76.38 5.91 90 top
UNK3_C35  104  [C0402]  77.68 5.91 90 top
UNK3_C36  470  [C0402]  80.32 11.87 270 top
UNK3_C37  470  [C0402]  80.83 13.65 0 top
UNK3_L1  3.9nH  [L0402]  79.56 9.35 90 top
UNK3_L2  5.1nH  [L0402]  81.72 14.92 180 top
UNK3_R12  433  [R0402]  78.98 5.91 90 top
UNK3_R13  183  [R0402]  82.88 5.91 90 top
UNK3_U1  JN516X  [HVQFN40_6X6]  74.6 11.11 0 top
UNK3_U2  RFANT3216120A5T  [ANT_3216-2PIN]  84.89 14.92 0 top
UNK3_Y1  32MHz  [OSC_SMD_2520]  73.05 6.02 0 top
UNK4_C1  226  [C0603]  27.4 20.91 270 top
UNK4_C19  104  [C0402]  27.91 22.94 0 top
UNK4_C20  104  [C0402]  27.91 29.16 180 top
UNK4_C21  104  [C0402]  28.03 25.48 90 top
UNK4_C27  104  [C0402]  38.28 20.91 270 top
UNK4_C28  103  [C0402]  28.79 21.05 90 top
UNK4_C29  103  [C0402]  33.29 20.91 270 top
UNK4_C30  474  [C0402]  39.58 20.91 270 top
UNK4_C31  104  [C402_25]  32.86 30.43 0 top
UNK4_C32  104  [C0402]  39.46 22.94 180 top
UNK4_C33  470  [C0402]  39.46 24.21 180 top
UNK4_C34  104  [C0402]  34.38 20.91 90 top
UNK4_C35  104  [C0402]  35.68 20.91 90 top
UNK4_C36  470  [C0402]  38.32 26.87 270 top
UNK4_C37  470  [C0402]  38.83 28.65 0 top
UNK4_L1  3.9nH  [L0402]  37.56 24.35 90 top
UNK4_L2  5.1nH  [L0402]  39.72 29.92 180 top
UNK4_R12  433  [R0402]  36.98 20.91 90 top
UNK4_R13  183  [R0402]  40.88 20.91 90 top
UNK4_U1  JN516X  [HVQFN40_6X6]  32.6 26.11 0 top
UNK4_U2  RFANT3216120A5T  [ANT_3216-2PIN]  42.89 29.92 0 top
UNK4_Y1  32MHz  [OSC_SMD_2520]  31.05 21.02 0 top
UNK5_C1  226  [C0603]  6.4 20.91 270 top
UNK5_C19  104  [C0402]  6.91 22.94 0 top
UNK5_C20  104  [C0402]  6.91 29.16 180 top
UNK5_C21  104  [C0402]  7.03 25.48 90 top
UNK5_C27  104  [C0402]  17.28 20.91 270 top
UNK5_C28  103  [C0402]  7.79 21.05 90 top
UNK5_C29  103  [C0402]  12.29 20.91 270 top
UNK5_C30  474  [C0402]  18.58 20.91 270 top
UNK5_C31  104  [C402_25]  11.86 30.43 0 top
UNK5_C32  104  [C0402]  18.46 22.94 180 top
UNK5_C33  470  [C0402]  18.46 24.21 180 top
UNK5_C34  104  [C0402]  13.38 20.91 90 top
UNK5_C35  104  [C0402]  14.68 20.91 90 top
UNK5_C36  470  [C0402]  17.32 26.87 270 top
UNK5_C37  470  [C0402]  17.83 28.65 0 top
UNK5_L1  3.9nH  [L0402]  16.56 24.35 90 top
UNK5_L2  5.1nH  [L0402]  18.72 29.92 180 top
UNK5_R12  433  [R0402]  15.98 20.91 90 top
UNK5_R13  183  [R0402]  19.88 20.91 90 top
UNK5_U1  JN516X  [HVQFN40_6X6]  11.6 26.11 0 top
UNK5_U2  RFANT3216120A5T  [ANT_3216-2PIN]  21.89 29.92 0 top
UNK5_Y1  32MHz  [OSC_SMD_2520]  10.05 21.02 0 top
UNK6_C1  226  [C0603]  48.4 20.91 270 top
UNK6_C19  104  [C0402]  48.91 22.94 0 top
UNK6_C20  104  [C0402]  48.91 29.16 180 top
UNK6_C21  104  [C0402]  49.03 25.48 90 top
UNK6_C27  104  [C0402]  59.28 20.91 270 top
UNK6_C28  103  [C0402]  49.79 21.05 90 top
UNK6_C29  103  [C0402]  54.29 20.91 270 top
UNK6_C30  474  [C0402]  60.58 20.91 270 top
UNK6_C31  104  [C402_25]  53.86 30.43 0 top
UNK6_C32  104  [C0402]  60.46 22.94 180 top
UNK6_C33  470  [C0402]  60.46 24.21 180 top
UNK6_C34  104  [C0402]  55.38 20.91 90 top
UNK6_C35  104  [C0402]  56.68 20.91 90 top
UNK6_C36  470  [C0402]  59.32 26.87 270 top
UNK6_C37  470  [C0402]  59.83 28.65 0 top
UNK6_L1  3.9nH  [L0402]  58.56 24.35 90 top
UNK6_L2  5.1nH  [L0402]  60.72 29.92 180 top
UNK6_R12  433  [R0402]  57.98 20.91 90 top
UNK6_R13  183  [R0402]  61.88 20.91 90 top
UNK6_U1  JN516X  [HVQFN40_6X6]  53.6 26.11 0 top
UNK6_U2  RFANT3216120A5T  [ANT_3216-2PIN]  63.89 29.92 0 top
UNK6_Y1  32MHz  [OSC_SMD_2520]  52.05 21.02 0 top
UNK7_C1  226  [C0603]  69.4 20.91 270 top
UNK7_C19  104  [C0402]  69.91 22.94 0 top
UNK7_C20  104  [C0402]  69.91 29.16 180 top
UNK7_C21  104  [C0402]  70.03 25.48 90 top
UNK7_C27  104  [C0402]  80.28 20.91 270 top
UNK7_C28  103  [C0402]  70.79 21.05 90 top
UNK7_C29  103  [C0402]  75.29 20.91 270 top
UNK7_C30  474  [C0402]  81.58 20.91 270 top
UNK7_C31  104  [C402_25]  74.86 30.43 0 top
UNK7_C32  104  [C0402]  81.46 22.94 180 top
UNK7_C33  470  [C0402]  81.46 24.21 180 top
UNK7_C34  104  [C0402]  76.38 20.91 90 top
UNK7_C35  104  [C0402]  77.68 20.91 90 top
UNK7_C36  470  [C0402]  80.32 26.87 270 top
UNK7_C37  470  [C0402]  80.83 28.65 0 top
UNK7_L1  3.9nH  [L0402]  79.56 24.35 90 top
UNK7_L2  5.1nH  [L0402]  81.72 29.92 180 top
UNK7_R12  433  [R0402]  78.98 20.91 90 top
UNK7_R13  183  [R0402]  82.88 20.91 90 top
UNK7_U1  JN516X  [HVQFN40_6X6]  74.6 26.11 0 top
UNK7_U2  RFANT3216120A5T  [ANT_3216-2PIN]  84.89 29.92 0 top
UNK7_Y1  32MHz  [OSC_SMD_2520]  73.05 21.02 0 top
UNK8_C1  226  [C0603]  6.4 35.91 270 top
UNK8_C19  104  [C0402]  6.91 37.94 0 top
UNK8_C20  104  [C0402]  6.91 44.16 180 top
UNK8_C21  104  [C0402]  7.03 40.48 90 top
UNK8_C27  104  [C0402]  17.28 35.91 270 top
UNK8_C28  103  [C0402]  7.79 36.05 90 top
UNK8_C29  103  [C0402]  12.29 35.91 270 top
UNK8_C30  474  [C0402]  18.58 35.91 270 top
UNK8_C31  104  [C402_25]  11.86 45.43 0 top
UNK8_C32  104  [C0402]  18.46 37.94 180 top
UNK8_C33  470  [C0402]  18.46 39.21 180 top
UNK8_C34  104  [C0402]  13.38 35.91 90 top
UNK8_C35  104  [C0402]  14.68 35.91 90 top
UNK8_C36  470  [C0402]  17.32 41.87 270 top
UNK8_C37  470  [C0402]  17.83 43.65 0 top
UNK8_L1  3.9nH  [L0402]  16.56 39.35 90 top
UNK8_L2  5.1nH  [L0402]  18.72 44.92 180 top
UNK8_R12  433  [R0402]  15.98 35.91 90 top
UNK8_R13  183  [R0402]  19.88 35.91 90 top
UNK8_U1  JN516X  [HVQFN40_6X6]  11.6 41.11 0 top
UNK8_U2  RFANT3216120A5T  [ANT_3216-2PIN]  21.89 44.92 0 top
UNK8_Y1  32MHz  [OSC_SMD_2520]  10.05 36.02 0 top
UNK9_C1  226  [C0603]  27.4 35.91 270 top
UNK9_C19  104  [C0402]  27.91 37.94 0 top
UNK9_C20  104  [C0402]  27.91 44.16 180 top
UNK9_C21  104  [C0402]  28.03 40.48 90 top
UNK9_C27  104  [C0402]  38.28 35.91 270 top
UNK9_C28  103  [C0402]  28.79 36.05 90 top
UNK9_C29  103  [C0402]  33.29 35.91 270 top
UNK9_C30  474  [C0402]  39.58 35.91 270 top
UNK9_C31  104  [C402_25]  32.86 45.43 0 top
UNK9_C32  104  [C0402]  39.46 37.94 180 top
UNK9_C33  470  [C0402]  39.46 39.21 180 top
UNK9_C34  104  [C0402]  34.38 35.91 90 top
UNK9_C35  104  [C0402]  35.68 35.91 90 top
UNK9_C36  470  [C0402]  38.32 41.87 270 top
UNK9_C37  470  [C0402]  38.83 43.65 0 top
UNK9_L1  3.9nH  [L0402]  37.56 39.35 90 top
UNK9_L2  5.1nH  [L0402]  39.72 44.92 180 top
UNK9_R12  433  [R0402]  36.98 35.91 90 top
UNK9_R13  183  [R0402]  40.88 35.91 90 top
UNK9_U1  JN516X  [HVQFN40_6X6]  32.6 41.11 0 top
UNK9_U2  RFANT3216120A5T  [ANT_3216-2PIN]  42.89 44.92 0 top
UNK9_Y1  32MHz  [OSC_SMD_2520]  31.05 36.02 0 top
UNK10_C1  226  [C0603]  48.4 35.91 270 top
UNK10_C19  104  [C0402]  48.91 37.94 0 top
UNK10_C20  104  [C0402]  48.91 44.16 180 top
UNK10_C21  104  [C0402]  49.03 40.48 90 top
UNK10_C27  104  [C0402]  59.28 35.91 270 top
UNK10_C28  103  [C0402]  49.79 36.05 90 top
UNK10_C29  103  [C0402]  54.29 35.91 270 top
UNK10_C30  474  [C0402]  60.58 35.91 270 top
UNK10_C31  104  [C402_25]  53.86 45.43 0 top
UNK10_C32  104  [C0402]  60.46 37.94 180 top
UNK10_C33  470  [C0402]  60.46 39.21 180 top
UNK10_C34  104  [C0402]  55.38 35.91 90 top
UNK10_C35  104  [C0402]  56.68 35.91 90 top
UNK10_C36  470  [C0402]  59.32 41.87 270 top
UNK10_C37  470  [C0402]  59.83 43.65 0 top
UNK10_L1  3.9nH  [L0402]  58.56 39.35 90 top
UNK10_L2  5.1nH  [L0402]  60.72 44.92 180 top
UNK10_R12  433  [R0402]  57.98 35.91 90 top
UNK10_R13  183  [R0402]  61.88 35.91 90 top
UNK10_U1  JN516X  [HVQFN40_6X6]  53.6 41.11 0 top
UNK10_U2  RFANT3216120A5T  [ANT_3216-2PIN]  63.89 44.92 0 top
UNK10_Y1  32MHz  [OSC_SMD_2520]  52.05 36.02 0 top
UNK11_C1  226  [C0603]  69.4 35.91 270 top
UNK11_C19  104  [C0402]  69.91 37.94 0 top
UNK11_C20  104  [C0402]  69.91 44.16 180 top
UNK11_C21  104  [C0402]  70.03 40.48 90 top
UNK11_C27  104  [C0402]  80.28 35.91 270 top
UNK11_C28  103  [C0402]  70.79 36.05 90 top
UNK11_C29  103  [C0402]  75.29 35.91 270 top
UNK11_C30  474  [C0402]  81.58 35.91 270 top
UNK11_C31  104  [C402_25]  74.86 45.43 0 top
UNK11_C32  104  [C0402]  81.46 37.94 180 top
UNK11_C33  470  [C0402]  81.46 39.21 180 top
UNK11_C34  104  [C0402]  76.38 35.91 90 top
UNK11_C35  104  [C0402]  77.68 35.91 90 top
UNK11_C36  470  [C0402]  80.32 41.87 270 top
UNK11_C37  470  [C0402]  80.83 43.65 0 top
UNK11_L1  3.9nH  [L0402]  79.56 39.35 90 top
UNK11_L2  5.1nH  [L0402]  81.72 44.92 180 top
UNK11_R12  433  [R0402]  78.98 35.91 90 top
UNK11_R13  183  [R0402]  82.88 35.91 90 top
UNK11_U1  JN516X  [HVQFN40_6X6]  74.6 41.11 0 top
UNK11_U2  RFANT3216120A5T  [ANT_3216-2PIN]  84.89 44.92 0 top
UNK11_Y1  32MHz  [OSC_SMD_2520]  73.05 36.02 0 top
Y1  32MHz  [OSC_SMD_2520]  10.05 6.02 0 top

## Library data of the parts
1_J1-1_J27 2_J1-2_J27 3_J1-3_J27 4_J1-4_J27 5_J1-5_J27 6_J1-6_J27 7_J1-7_J27 8_J1-8_J27 9_J1-9_J27 10_J1-10_J27 11_J1-11_J27 J1-J27 = CON1
C1 C19-C21 C27-C30 C32-C37 UNK1_C1 UNK1_C19-UNK1_C21 UNK1_C27-UNK1_C30 UNK1_C32-UNK1_C37 UNK2_C1 UNK2_C19-UNK2_C21 UNK2_C27-UNK2_C30 UNK2_C32-UNK2_C37 UNK3_C1 UNK3_C19-UNK3_C21 UNK3_C27-UNK3_C30 UNK3_C32-UNK3_C37 UNK4_C1 UNK4_C19-UNK4_C21 UNK4_C27-UNK4_C30 UNK4_C32-UNK4_C37 UNK5_C1 UNK5_C19-UNK5_C21 UNK5_C27-UNK5_C30 UNK5_C32-UNK5_C37 UNK6_C1 UNK6_C19-UNK6_C21 UNK6_C27-UNK6_C30 UNK6_C32-UNK6_C37 UNK7_C1 UNK7_C19-UNK7_C21 UNK7_C27-UNK7_C30 UNK7_C32-UNK7_C37 UNK8_C1 UNK8_C19-UNK8_C21 UNK8_C27-UNK8_C30 UNK8_C32-UNK8_C37 UNK9_C1 UNK9_C19-UNK9_C21 UNK9_C27-UNK9_C30 UNK9_C32-UNK9_C37 UNK10_C1 UNK10_C19-UNK10_C21 UNK10_C27-UNK10_C30 UNK10_C32-UNK10_C37 UNK11_C1 UNK11_C19-UNK11_C21 UNK11_C27-UNK11_C30 UNK11_C32-UNK11_C37 = CAP_NP
C31 UNK1_C31 UNK2_C31 UNK3_C31 UNK4_C31 UNK5_C31 UNK6_C31 UNK7_C31 UNK8_C31 UNK9_C31 UNK10_C31 UNK11_C31 = CAP_NP: Tolerance: TOLERANCE; User Part Number: USERPART#
L1 L2 UNK1_L1 UNK1_L2 UNK2_L1 UNK2_L2 UNK3_L1 UNK3_L2 UNK4_L1 UNK4_L2 UNK5_L1 UNK5_L2 UNK6_L1 UNK6_L2 UNK7_L1 UNK7_L2 UNK8_L1 UNK8_L2 UNK9_L1 UNK9_L2 UNK10_L1 UNK10_L2 UNK11_L1 UNK11_L2 = L
R12 R13 UNK1_R12 UNK1_R13 UNK2_R12 UNK2_R13 UNK3_R12 UNK3_R13 UNK4_R12 UNK4_R13 UNK5_R12 UNK5_R13 UNK6_R12 UNK6_R13 UNK7_R12 UNK7_R13 UNK8_R12 UNK8_R13 UNK9_R12 UNK9_R13 UNK10_R12 UNK10_R13 UNK11_R12 UNK11_R13 = R2
U1 UNK1_U1 UNK2_U1 UNK3_U1 UNK4_U1 UNK5_U1 UNK6_U1 UNK7_U1 UNK8_U1 UNK9_U1 UNK10_U1 UNK11_U1 = JN516X
U2 UNK1_U2 UNK2_U2 UNK3_U2 UNK4_U2 UNK5_U2 UNK6_U2 UNK7_U2 UNK8_U2 UNK9_U2 UNK10_U2 UNK11_U2 = ANA-2PIN
UNK1_Y1 UNK2_Y1 UNK3_Y1 UNK4_Y1 UNK5_Y1 UNK6_Y1 UNK7_Y1 UNK8_Y1 UNK9_Y1 UNK10_Y1 UNK11_Y1 Y1 = G_OSC_4PINpassive

## Footprints (pads in the part's own frame, mm; a bottom-side part is the same pattern mirrored in y, then rotated)
ANT_3216-2PIN
  rect 0.8x1.6 smd: 1(-1.7,0) 2(1.7,0)
C0402
  rect 0.635x0.635 smd: 1(-0.508,0) 2(0.508,0)
C402_25
  round 0.635 smd: 1(-0.508,0) 2(0.508,0)
C0603
  rect 0.762x0.762 smd: 1(-0.711,0) 2(0.711,0)
HALF_DRILL_0R8_0R8
  round 0.8 hole 0.5: 1(0,0)
HVQFN40_6X6
  oval 0.3x0.875 smd: 1(-2.25,-2.938) 2(-1.75,-2.938) 3(-1.25,-2.938) 4(-0.75,-2.938) 5(-0.25,-2.938) 6(0.25,-2.938) 7(0.75,-2.938) 8(1.25,-2.938) 9(1.75,-2.938) 10(2.25,-2.938) 21(2.25,2.938) 22(1.75,2.938) 23(1.25,2.938) 24(0.75,2.938) 25(0.25,2.938) 26(-0.25,2.938) 27(-0.75,2.938) 28(-1.25,2.938) 29(-1.75,2.938) 30(-2.25,2.938)
  oval 0.875x0.3 smd: 11(2.938,-2.25) 12(2.938,-1.75) 13(2.938,-1.25) 14(2.938,-0.75) 15(2.938,-0.25) 16(2.938,0.25) 17(2.938,0.75) 18(2.938,1.25) 19(2.938,1.75) 20(2.938,2.25) 31(-2.938,2.25) 32(-2.938,1.75) 33(-2.938,1.25) 34(-2.938,0.75) 35(-2.938,0.25) 36(-2.938,-0.25) 37(-2.938,-0.75) 38(-2.938,-1.25) 39(-2.938,-1.75) 40(-2.938,-2.25)
  rect 4.6x4.6 smd: 41(0,0)
L0402
  rect 0.635x0.635 smd: 1(-0.508,0) 2(0.508,0)
OSC_SMD_2520
  rect 1x0.9 smd: 1(-0.85,-0.65) 2(0.85,-0.65) 3(0.85,0.65) 4(-0.85,0.65)
R0402
  rect 0.635x0.635 smd: 1(-0.508,0) 2(0.508,0)
unnamed
  round 1.016 smd: 1(0,0)
unnamed#2
  round 3 hole 2.2: (0,0)

## Nets
GND: C1.2 C19.2 C20.2 C21.1 C27.2 C28.2 C29.2 C30.2 C31.1 C32.1 C33.1 C34.1 C35.1 C37.2 J27.1 R12.1 U1.21 U1.39 U1.41
VCC_3V3: C1.1 C19.1 C20.1 J26.1 R13.1 U1.9 U1.30
1_GND: 1_J27.1 UNK1_C1.2 UNK1_C19.2 UNK1_C20.2 UNK1_C21.1 UNK1_C27.2 UNK1_C28.2 UNK1_C29.2 UNK1_C30.2 UNK1_C31.1 UNK1_C32.1 UNK1_C33.1 UNK1_C34.1 UNK1_C35.1 UNK1_C37.2 UNK1_R12.1 UNK1_U1.21 UNK1_U1.39 UNK1_U1.41
1_N16770935: 1_J2.1 UNK1_U1.15
1_N16770957: 1_J4.1 UNK1_U1.24
1_N16770977: 1_J5.1 UNK1_U1.23
1_N16770981: 1_J6.1 UNK1_U1.2
1_N16771025: 1_J7.1 UNK1_U1.1
1_N16771029: 1_J8.1 UNK1_U1.40
1_N16771033: 1_J9.1 UNK1_U1.38
1_N16771037: 1_J10.1 UNK1_U1.37
1_N16771041: 1_J11.1 UNK1_U1.36
1_N16771045: 1_J12.1 UNK1_U1.34
1_N16771097: 1_J13.1 UNK1_U1.33
1_N16771101: 1_J14.1 UNK1_U1.32
1_N16771105: 1_J15.1 UNK1_U1.31
1_N16771109: 1_J16.1 UNK1_U1.29
1_N16771113: 1_J17.1 UNK1_U1.28
1_N16771117: 1_J18.1 UNK1_U1.27
1_N16771169: 1_J19.1 UNK1_U1.26
1_N16771173: 1_J20.1 UNK1_U1.19
1_N16771177: 1_J21.1 UNK1_U1.18
1_N16771181: 1_J22.1 UNK1_U1.17
1_N16771185: 1_J23.1 UNK1_U1.16
1_N16771189: 1_J24.1 UNK1_U1.20
1_N16771253: 1_J25.1 UNK1_U1.22
1_N16771332: UNK1_C35.2 UNK1_U1.8
1_N16771518: UNK1_C21.2 UNK1_U1.35
1_N16771899: UNK1_R12.2 UNK1_U1.10
1_N16772356: UNK1_C28.1 UNK1_U1.4 UNK1_Y1.1
1_N16772365: UNK1_C29.1 UNK1_U1.5 UNK1_Y1.3
1_N16774038: UNK1_C34.2 UNK1_U1.6
1_N16774061: UNK1_C31.2 UNK1_U1.25
1_N16775877: UNK1_C36.2 UNK1_L1.2 UNK1_U1.13
1_N16775955: UNK1_C36.1 UNK1_C37.1 UNK1_L2.2
1_N16775963: UNK1_L2.1 UNK1_U2.1
1_RESET: 1_J1.1 UNK1_C30.1 UNK1_R13.2 UNK1_U1.3
1_VB_RF: UNK1_C32.2 UNK1_C33.2 UNK1_L1.1 UNK1_U1.12 UNK1_U1.14
1_VCC_3V3: 1_J26.1 UNK1_C1.1 UNK1_C19.1 UNK1_C20.1 UNK1_R13.1 UNK1_U1.9 UNK1_U1.30
1_VREF: 1_J3.1 UNK1_C27.1 UNK1_U1.11
2_GND: 2_J27.1 UNK2_C1.2 UNK2_C19.2 UNK2_C20.2 UNK2_C21.1 UNK2_C27.2 UNK2_C28.2 UNK2_C29.2 UNK2_C30.2 UNK2_C31.1 UNK2_C32.1 UNK2_C33.1 UNK2_C34.1 UNK2_C35.1 UNK2_C37.2 UNK2_R12.1 UNK2_U1.21 UNK2_U1.39 UNK2_U1.41
2_N16770935: 2_J2.1 UNK2_U1.15
2_N16770957: 2_J4.1 UNK2_U1.24
2_N16770977: 2_J5.1 UNK2_U1.23
2_N16770981: 2_J6.1 UNK2_U1.2
2_N16771025: 2_J7.1 UNK2_U1.1
2_N16771029: 2_J8.1 UNK2_U1.40
2_N16771033: 2_J9.1 UNK2_U1.38
2_N16771037: 2_J10.1 UNK2_U1.37
2_N16771041: 2_J11.1 UNK2_U1.36
2_N16771045: 2_J12.1 UNK2_U1.34
2_N16771097: 2_J13.1 UNK2_U1.33
2_N16771101: 2_J14.1 UNK2_U1.32
2_N16771105: 2_J15.1 UNK2_U1.31
2_N16771109: 2_J16.1 UNK2_U1.29
2_N16771113: 2_J17.1 UNK2_U1.28
2_N16771117: 2_J18.1 UNK2_U1.27
2_N16771169: 2_J19.1 UNK2_U1.26
2_N16771173: 2_J20.1 UNK2_U1.19
2_N16771177: 2_J21.1 UNK2_U1.18
2_N16771181: 2_J22.1 UNK2_U1.17
2_N16771185: 2_J23.1 UNK2_U1.16
2_N16771189: 2_J24.1 UNK2_U1.20
2_N16771253: 2_J25.1 UNK2_U1.22
2_N16771332: UNK2_C35.2 UNK2_U1.8
2_N16771518: UNK2_C21.2 UNK2_U1.35
2_N16771899: UNK2_R12.2 UNK2_U1.10
2_N16772356: UNK2_C28.1 UNK2_U1.4 UNK2_Y1.1
2_N16772365: UNK2_C29.1 UNK2_U1.5 UNK2_Y1.3
2_N16774038: UNK2_C34.2 UNK2_U1.6
2_N16774061: UNK2_C31.2 UNK2_U1.25
2_N16775877: UNK2_C36.2 UNK2_L1.2 UNK2_U1.13
2_N16775955: UNK2_C36.1 UNK2_C37.1 UNK2_L2.2
2_N16775963: UNK2_L2.1 UNK2_U2.1
2_RESET: 2_J1.1 UNK2_C30.1 UNK2_R13.2 UNK2_U1.3
2_VB_RF: UNK2_C32.2 UNK2_C33.2 UNK2_L1.1 UNK2_U1.12 UNK2_U1.14
2_VCC_3V3: 2_J26.1 UNK2_C1.1 UNK2_C19.1 UNK2_C20.1 UNK2_R13.1 UNK2_U1.9 UNK2_U1.30
2_VREF: 2_J3.1 UNK2_C27.1 UNK2_U1.11
3_GND: 3_J27.1 UNK3_C1.2 UNK3_C19.2 UNK3_C20.2 UNK3_C21.1 UNK3_C27.2 UNK3_C28.2 UNK3_C29.2 UNK3_C30.2 UNK3_C31.1 UNK3_C32.1 UNK3_C33.1 UNK3_C34.1 UNK3_C35.1 UNK3_C37.2 UNK3_R12.1 UNK3_U1.21 UNK3_U1.39 UNK3_U1.41
3_N16770935: 3_J2.1 UNK3_U1.15
3_N16770957: 3_J4.1 UNK3_U1.24
3_N16770977: 3_J5.1 UNK3_U1.23
3_N16770981: 3_J6.1 UNK3_U1.2
3_N16771025: 3_J7.1 UNK3_U1.1
3_N16771029: 3_J8.1 UNK3_U1.40
3_N16771033: 3_J9.1 UNK3_U1.38
3_N16771037: 3_J10.1 UNK3_U1.37
3_N16771041: 3_J11.1 UNK3_U1.36
3_N16771045: 3_J12.1 UNK3_U1.34
3_N16771097: 3_J13.1 UNK3_U1.33
3_N16771101: 3_J14.1 UNK3_U1.32
3_N16771105: 3_J15.1 UNK3_U1.31
3_N16771109: 3_J16.1 UNK3_U1.29
3_N16771113: 3_J17.1 UNK3_U1.28
3_N16771117: 3_J18.1 UNK3_U1.27
3_N16771169: 3_J19.1 UNK3_U1.26
3_N16771173: 3_J20.1 UNK3_U1.19
3_N16771177: 3_J21.1 UNK3_U1.18
3_N16771181: 3_J22.1 UNK3_U1.17
3_N16771185: 3_J23.1 UNK3_U1.16
3_N16771189: 3_J24.1 UNK3_U1.20
3_N16771253: 3_J25.1 UNK3_U1.22
3_N16771332: UNK3_C35.2 UNK3_U1.8
3_N16771518: UNK3_C21.2 UNK3_U1.35
3_N16771899: UNK3_R12.2 UNK3_U1.10
3_N16772356: UNK3_C28.1 UNK3_U1.4 UNK3_Y1.1
3_N16772365: UNK3_C29.1 UNK3_U1.5 UNK3_Y1.3
3_N16774038: UNK3_C34.2 UNK3_U1.6
3_N16774061: UNK3_C31.2 UNK3_U1.25
3_N16775877: UNK3_C36.2 UNK3_L1.2 UNK3_U1.13
3_N16775955: UNK3_C36.1 UNK3_C37.1 UNK3_L2.2
3_N16775963: UNK3_L2.1 UNK3_U2.1
3_RESET: 3_J1.1 UNK3_C30.1 UNK3_R13.2 UNK3_U1.3
3_VB_RF: UNK3_C32.2 UNK3_C33.2 UNK3_L1.1 UNK3_U1.12 UNK3_U1.14
3_VCC_3V3: 3_J26.1 UNK3_C1.1 UNK3_C19.1 UNK3_C20.1 UNK3_R13.1 UNK3_U1.9 UNK3_U1.30
3_VREF: 3_J3.1 UNK3_C27.1 UNK3_U1.11
4_GND: 4_J27.1 UNK4_C1.2 UNK4_C19.2 UNK4_C20.2 UNK4_C21.1 UNK4_C27.2 UNK4_C28.2 UNK4_C29.2 UNK4_C30.2 UNK4_C31.1 UNK4_C32.1 UNK4_C33.1 UNK4_C34.1 UNK4_C35.1 UNK4_C37.2 UNK4_R12.1 UNK4_U1.21 UNK4_U1.39 UNK4_U1.41
4_N16770935: 4_J2.1 UNK4_U1.15
4_N16770957: 4_J4.1 UNK4_U1.24
4_N16770977: 4_J5.1 UNK4_U1.23
4_N16770981: 4_J6.1 UNK4_U1.2
4_N16771025: 4_J7.1 UNK4_U1.1
4_N16771029: 4_J8.1 UNK4_U1.40
4_N16771033: 4_J9.1 UNK4_U1.38
4_N16771037: 4_J10.1 UNK4_U1.37
4_N16771041: 4_J11.1 UNK4_U1.36
4_N16771045: 4_J12.1 UNK4_U1.34
4_N16771097: 4_J13.1 UNK4_U1.33
4_N16771101: 4_J14.1 UNK4_U1.32
4_N16771105: 4_J15.1 UNK4_U1.31
4_N16771109: 4_J16.1 UNK4_U1.29
4_N16771113: 4_J17.1 UNK4_U1.28
4_N16771117: 4_J18.1 UNK4_U1.27
4_N16771169: 4_J19.1 UNK4_U1.26
4_N16771173: 4_J20.1 UNK4_U1.19
4_N16771177: 4_J21.1 UNK4_U1.18
4_N16771181: 4_J22.1 UNK4_U1.17
4_N16771185: 4_J23.1 UNK4_U1.16
4_N16771189: 4_J24.1 UNK4_U1.20
4_N16771253: 4_J25.1 UNK4_U1.22
4_N16771332: UNK4_C35.2 UNK4_U1.8
4_N16771518: UNK4_C21.2 UNK4_U1.35
4_N16771899: UNK4_R12.2 UNK4_U1.10
4_N16772356: UNK4_C28.1 UNK4_U1.4 UNK4_Y1.1
4_N16772365: UNK4_C29.1 UNK4_U1.5 UNK4_Y1.3
4_N16774038: UNK4_C34.2 UNK4_U1.6
4_N16774061: UNK4_C31.2 UNK4_U1.25
4_N16775877: UNK4_C36.2 UNK4_L1.2 UNK4_U1.13
4_N16775955: UNK4_C36.1 UNK4_C37.1 UNK4_L2.2
4_N16775963: UNK4_L2.1 UNK4_U2.1
4_RESET: 4_J1.1 UNK4_C30.1 UNK4_R13.2 UNK4_U1.3
4_VB_RF: UNK4_C32.2 UNK4_C33.2 UNK4_L1.1 UNK4_U1.12 UNK4_U1.14
4_VCC_3V3: 4_J26.1 UNK4_C1.1 UNK4_C19.1 UNK4_C20.1 UNK4_R13.1 UNK4_U1.9 UNK4_U1.30
4_VREF: 4_J3.1 UNK4_C27.1 UNK4_U1.11
5_GND: 5_J27.1 UNK5_C1.2 UNK5_C19.2 UNK5_C20.2 UNK5_C21.1 UNK5_C27.2 UNK5_C28.2 UNK5_C29.2 UNK5_C30.2 UNK5_C31.1 UNK5_C32.1 UNK5_C33.1 UNK5_C34.1 UNK5_C35.1 UNK5_C37.2 UNK5_R12.1 UNK5_U1.21 UNK5_U1.39 UNK5_U1.41
5_N16770935: 5_J2.1 UNK5_U1.15
5_N16770957: 5_J4.1 UNK5_U1.24
5_N16770977: 5_J5.1 UNK5_U1.23
5_N16770981: 5_J6.1 UNK5_U1.2
5_N16771025: 5_J7.1 UNK5_U1.1
5_N16771029: 5_J8.1 UNK5_U1.40
5_N16771033: 5_J9.1 UNK5_U1.38
5_N16771037: 5_J10.1 UNK5_U1.37
5_N16771041: 5_J11.1 UNK5_U1.36
5_N16771045: 5_J12.1 UNK5_U1.34
5_N16771097: 5_J13.1 UNK5_U1.33
5_N16771101: 5_J14.1 UNK5_U1.32
5_N16771105: 5_J15.1 UNK5_U1.31
5_N16771109: 5_J16.1 UNK5_U1.29
5_N16771113: 5_J17.1 UNK5_U1.28
5_N16771117: 5_J18.1 UNK5_U1.27
5_N16771169: 5_J19.1 UNK5_U1.26
5_N16771173: 5_J20.1 UNK5_U1.19
5_N16771177: 5_J21.1 UNK5_U1.18
5_N16771181: 5_J22.1 UNK5_U1.17
5_N16771185: 5_J23.1 UNK5_U1.16
5_N16771189: 5_J24.1 UNK5_U1.20
5_N16771253: 5_J25.1 UNK5_U1.22
5_N16771332: UNK5_C35.2 UNK5_U1.8
5_N16771518: UNK5_C21.2 UNK5_U1.35
5_N16771899: UNK5_R12.2 UNK5_U1.10
5_N16772356: UNK5_C28.1 UNK5_U1.4 UNK5_Y1.1
5_N16772365: UNK5_C29.1 UNK5_U1.5 UNK5_Y1.3
5_N16774038: UNK5_C34.2 UNK5_U1.6
5_N16774061: UNK5_C31.2 UNK5_U1.25
5_N16775877: UNK5_C36.2 UNK5_L1.2 UNK5_U1.13
5_N16775955: UNK5_C36.1 UNK5_C37.1 UNK5_L2.2
5_N16775963: UNK5_L2.1 UNK5_U2.1
5_RESET: 5_J1.1 UNK5_C30.1 UNK5_R13.2 UNK5_U1.3
5_VB_RF: UNK5_C32.2 UNK5_C33.2 UNK5_L1.1 UNK5_U1.12 UNK5_U1.14
5_VCC_3V3: 5_J26.1 UNK5_C1.1 UNK5_C19.1 UNK5_C20.1 UNK5_R13.1 UNK5_U1.9 UNK5_U1.30
5_VREF: 5_J3.1 UNK5_C27.1 UNK5_U1.11
6_GND: 6_J27.1 UNK6_C1.2 UNK6_C19.2 UNK6_C20.2 UNK6_C21.1 UNK6_C27.2 UNK6_C28.2 UNK6_C29.2 UNK6_C30.2 UNK6_C31.1 UNK6_C32.1 UNK6_C33.1 UNK6_C34.1 UNK6_C35.1 UNK6_C37.2 UNK6_R12.1 UNK6_U1.21 UNK6_U1.39 UNK6_U1.41
6_N16770935: 6_J2.1 UNK6_U1.15
6_N16770957: 6_J4.1 UNK6_U1.24
6_N16770977: 6_J5.1 UNK6_U1.23
6_N16770981: 6_J6.1 UNK6_U1.2
6_N16771025: 6_J7.1 UNK6_U1.1
6_N16771029: 6_J8.1 UNK6_U1.40
6_N16771033: 6_J9.1 UNK6_U1.38
6_N16771037: 6_J10.1 UNK6_U1.37
6_N16771041: 6_J11.1 UNK6_U1.36
6_N16771045: 6_J12.1 UNK6_U1.34
6_N16771097: 6_J13.1 UNK6_U1.33
6_N16771101: 6_J14.1 UNK6_U1.32
6_N16771105: 6_J15.1 UNK6_U1.31
6_N16771109: 6_J16.1 UNK6_U1.29
6_N16771113: 6_J17.1 UNK6_U1.28
6_N16771117: 6_J18.1 UNK6_U1.27
6_N16771169: 6_J19.1 UNK6_U1.26
6_N16771173: 6_J20.1 UNK6_U1.19
6_N16771177: 6_J21.1 UNK6_U1.18
6_N16771181: 6_J22.1 UNK6_U1.17
6_N16771185: 6_J23.1 UNK6_U1.16
6_N16771189: 6_J24.1 UNK6_U1.20
6_N16771253: 6_J25.1 UNK6_U1.22
6_N16771332: UNK6_C35.2 UNK6_U1.8
6_N16771518: UNK6_C21.2 UNK6_U1.35
6_N16771899: UNK6_R12.2 UNK6_U1.10
6_N16772356: UNK6_C28.1 UNK6_U1.4 UNK6_Y1.1
6_N16772365: UNK6_C29.1 UNK6_U1.5 UNK6_Y1.3
6_N16774038: UNK6_C34.2 UNK6_U1.6
6_N16774061: UNK6_C31.2 UNK6_U1.25
6_N16775877: UNK6_C36.2 UNK6_L1.2 UNK6_U1.13
6_N16775955: UNK6_C36.1 UNK6_C37.1 UNK6_L2.2
6_N16775963: UNK6_L2.1 UNK6_U2.1
6_RESET: 6_J1.1 UNK6_C30.1 UNK6_R13.2 UNK6_U1.3
6_VB_RF: UNK6_C32.2 UNK6_C33.2 UNK6_L1.1 UNK6_U1.12 UNK6_U1.14
6_VCC_3V3: 6_J26.1 UNK6_C1.1 UNK6_C19.1 UNK6_C20.1 UNK6_R13.1 UNK6_U1.9 UNK6_U1.30
6_VREF: 6_J3.1 UNK6_C27.1 UNK6_U1.11
7_GND: 7_J27.1 UNK7_C1.2 UNK7_C19.2 UNK7_C20.2 UNK7_C21.1 UNK7_C27.2 UNK7_C28.2 UNK7_C29.2 UNK7_C30.2 UNK7_C31.1 UNK7_C32.1 UNK7_C33.1 UNK7_C34.1 UNK7_C35.1 UNK7_C37.2 UNK7_R12.1 UNK7_U1.21 UNK7_U1.39 UNK7_U1.41
7_N16770935: 7_J2.1 UNK7_U1.15
7_N16770957: 7_J4.1 UNK7_U1.24
7_N16770977: 7_J5.1 UNK7_U1.23
7_N16770981: 7_J6.1 UNK7_U1.2
7_N16771025: 7_J7.1 UNK7_U1.1
7_N16771029: 7_J8.1 UNK7_U1.40
7_N16771033: 7_J9.1 UNK7_U1.38
7_N16771037: 7_J10.1 UNK7_U1.37
7_N16771041: 7_J11.1 UNK7_U1.36
7_N16771045: 7_J12.1 UNK7_U1.34
7_N16771097: 7_J13.1 UNK7_U1.33
7_N16771101: 7_J14.1 UNK7_U1.32
7_N16771105: 7_J15.1 UNK7_U1.31
7_N16771109: 7_J16.1 UNK7_U1.29
7_N16771113: 7_J17.1 UNK7_U1.28
7_N16771117: 7_J18.1 UNK7_U1.27
7_N16771169: 7_J19.1 UNK7_U1.26
7_N16771173: 7_J20.1 UNK7_U1.19
7_N16771177: 7_J21.1 UNK7_U1.18
7_N16771181: 7_J22.1 UNK7_U1.17
7_N16771185: 7_J23.1 UNK7_U1.16
7_N16771189: 7_J24.1 UNK7_U1.20
7_N16771253: 7_J25.1 UNK7_U1.22
7_N16771332: UNK7_C35.2 UNK7_U1.8
7_N16771518: UNK7_C21.2 UNK7_U1.35
7_N16771899: UNK7_R12.2 UNK7_U1.10
7_N16772356: UNK7_C28.1 UNK7_U1.4 UNK7_Y1.1
7_N16772365: UNK7_C29.1 UNK7_U1.5 UNK7_Y1.3
7_N16774038: UNK7_C34.2 UNK7_U1.6
7_N16774061: UNK7_C31.2 UNK7_U1.25
7_N16775877: UNK7_C36.2 UNK7_L1.2 UNK7_U1.13
7_N16775955: UNK7_C36.1 UNK7_C37.1 UNK7_L2.2
7_N16775963: UNK7_L2.1 UNK7_U2.1
7_RESET: 7_J1.1 UNK7_C30.1 UNK7_R13.2 UNK7_U1.3
7_VB_RF: UNK7_C32.2 UNK7_C33.2 UNK7_L1.1 UNK7_U1.12 UNK7_U1.14
7_VCC_3V3: 7_J26.1 UNK7_C1.1 UNK7_C19.1 UNK7_C20.1 UNK7_R13.1 UNK7_U1.9 UNK7_U1.30
7_VREF: 7_J3.1 UNK7_C27.1 UNK7_U1.11
8_GND: 8_J27.1 UNK8_C1.2 UNK8_C19.2 UNK8_C20.2 UNK8_C21.1 UNK8_C27.2 UNK8_C28.2 UNK8_C29.2 UNK8_C30.2 UNK8_C31.1 UNK8_C32.1 UNK8_C33.1 UNK8_C34.1 UNK8_C35.1 UNK8_C37.2 UNK8_R12.1 UNK8_U1.21 UNK8_U1.39 UNK8_U1.41
8_N16770935: 8_J2.1 UNK8_U1.15
8_N16770957: 8_J4.1 UNK8_U1.24
8_N16770977: 8_J5.1 UNK8_U1.23
8_N16770981: 8_J6.1 UNK8_U1.2
8_N16771025: 8_J7.1 UNK8_U1.1
8_N16771029: 8_J8.1 UNK8_U1.40
8_N16771033: 8_J9.1 UNK8_U1.38
8_N16771037: 8_J10.1 UNK8_U1.37
8_N16771041: 8_J11.1 UNK8_U1.36
8_N16771045: 8_J12.1 UNK8_U1.34
8_N16771097: 8_J13.1 UNK8_U1.33
8_N16771101: 8_J14.1 UNK8_U1.32
8_N16771105: 8_J15.1 UNK8_U1.31
8_N16771109: 8_J16.1 UNK8_U1.29
8_N16771113: 8_J17.1 UNK8_U1.28
8_N16771117: 8_J18.1 UNK8_U1.27
8_N16771169: 8_J19.1 UNK8_U1.26
8_N16771173: 8_J20.1 UNK8_U1.19
8_N16771177: 8_J21.1 UNK8_U1.18
8_N16771181: 8_J22.1 UNK8_U1.17
8_N16771185: 8_J23.1 UNK8_U1.16
8_N16771189: 8_J24.1 UNK8_U1.20
8_N16771253: 8_J25.1 UNK8_U1.22
8_N16771332: UNK8_C35.2 UNK8_U1.8
8_N16771518: UNK8_C21.2 UNK8_U1.35
8_N16771899: UNK8_R12.2 UNK8_U1.10
8_N16772356: UNK8_C28.1 UNK8_U1.4 UNK8_Y1.1
8_N16772365: UNK8_C29.1 UNK8_U1.5 UNK8_Y1.3
8_N16774038: UNK8_C34.2 UNK8_U1.6
8_N16774061: UNK8_C31.2 UNK8_U1.25
8_N16775877: UNK8_C36.2 UNK8_L1.2 UNK8_U1.13
8_N16775955: UNK8_C36.1 UNK8_C37.1 UNK8_L2.2
8_N16775963: UNK8_L2.1 UNK8_U2.1
8_RESET: 8_J1.1 UNK8_C30.1 UNK8_R13.2 UNK8_U1.3
8_VB_RF: UNK8_C32.2 UNK8_C33.2 UNK8_L1.1 UNK8_U1.12 UNK8_U1.14
8_VCC_3V3: 8_J26.1 UNK8_C1.1 UNK8_C19.1 UNK8_C20.1 UNK8_R13.1 UNK8_U1.9 UNK8_U1.30
8_VREF: 8_J3.1 UNK8_C27.1 UNK8_U1.11
9_GND: 9_J27.1 UNK9_C1.2 UNK9_C19.2 UNK9_C20.2 UNK9_C21.1 UNK9_C27.2 UNK9_C28.2 UNK9_C29.2 UNK9_C30.2 UNK9_C31.1 UNK9_C32.1 UNK9_C33.1 UNK9_C34.1 UNK9_C35.1 UNK9_C37.2 UNK9_R12.1 UNK9_U1.21 UNK9_U1.39 UNK9_U1.41
9_N16770935: 9_J2.1 UNK9_U1.15
9_N16770957: 9_J4.1 UNK9_U1.24
9_N16770977: 9_J5.1 UNK9_U1.23
9_N16770981: 9_J6.1 UNK9_U1.2
9_N16771025: 9_J7.1 UNK9_U1.1
9_N16771029: 9_J8.1 UNK9_U1.40
9_N16771033: 9_J9.1 UNK9_U1.38
9_N16771037: 9_J10.1 UNK9_U1.37
9_N16771041: 9_J11.1 UNK9_U1.36
9_N16771045: 9_J12.1 UNK9_U1.34
9_N16771097: 9_J13.1 UNK9_U1.33
9_N16771101: 9_J14.1 UNK9_U1.32
9_N16771105: 9_J15.1 UNK9_U1.31
9_N16771109: 9_J16.1 UNK9_U1.29
9_N16771113: 9_J17.1 UNK9_U1.28
9_N16771117: 9_J18.1 UNK9_U1.27
9_N16771169: 9_J19.1 UNK9_U1.26
9_N16771173: 9_J20.1 UNK9_U1.19
9_N16771177: 9_J21.1 UNK9_U1.18
9_N16771181: 9_J22.1 UNK9_U1.17
9_N16771185: 9_J23.1 UNK9_U1.16
9_N16771189: 9_J24.1 UNK9_U1.20
9_N16771253: 9_J25.1 UNK9_U1.22
9_N16771332: UNK9_C35.2 UNK9_U1.8
9_N16771518: UNK9_C21.2 UNK9_U1.35
9_N16771899: UNK9_R12.2 UNK9_U1.10
9_N16772356: UNK9_C28.1 UNK9_U1.4 UNK9_Y1.1
9_N16772365: UNK9_C29.1 UNK9_U1.5 UNK9_Y1.3
9_N16774038: UNK9_C34.2 UNK9_U1.6
9_N16774061: UNK9_C31.2 UNK9_U1.25
9_N16775877: UNK9_C36.2 UNK9_L1.2 UNK9_U1.13
9_N16775955: UNK9_C36.1 UNK9_C37.1 UNK9_L2.2
9_N16775963: UNK9_L2.1 UNK9_U2.1
9_RESET: 9_J1.1 UNK9_C30.1 UNK9_R13.2 UNK9_U1.3
9_VB_RF: UNK9_C32.2 UNK9_C33.2 UNK9_L1.1 UNK9_U1.12 UNK9_U1.14
9_VCC_3V3: 9_J26.1 UNK9_C1.1 UNK9_C19.1 UNK9_C20.1 UNK9_R13.1 UNK9_U1.9 UNK9_U1.30
9_VREF: 9_J3.1 UNK9_C27.1 UNK9_U1.11
10_GND: 10_J27.1 UNK10_C1.2 UNK10_C19.2 UNK10_C20.2 UNK10_C21.1 UNK10_C27.2 UNK10_C28.2 UNK10_C29.2 UNK10_C30.2 UNK10_C31.1 UNK10_C32.1 UNK10_C33.1 UNK10_C34.1 UNK10_C35.1 UNK10_C37.2 UNK10_R12.1 UNK10_U1.21 UNK10_U1.39 UNK10_U1.41
10_N16770935: 10_J2.1 UNK10_U1.15
10_N16770957: 10_J4.1 UNK10_U1.24
10_N16770977: 10_J5.1 UNK10_U1.23
10_N16770981: 10_J6.1 UNK10_U1.2
10_N16771025: 10_J7.1 UNK10_U1.1
10_N16771029: 10_J8.1 UNK10_U1.40
10_N16771033: 10_J9.1 UNK10_U1.38
10_N16771037: 10_J10.1 UNK10_U1.37
10_N16771041: 10_J11.1 UNK10_U1.36
10_N16771045: 10_J12.1 UNK10_U1.34
10_N16771097: 10_J13.1 UNK10_U1.33
10_N16771101: 10_J14.1 UNK10_U1.32
10_N16771105: 10_J15.1 UNK10_U1.31
10_N16771109: 10_J16.1 UNK10_U1.29
10_N16771113: 10_J17.1 UNK10_U1.28
10_N16771117: 10_J18.1 UNK10_U1.27
10_N16771169: 10_J19.1 UNK10_U1.26
10_N16771173: 10_J20.1 UNK10_U1.19
10_N16771177: 10_J21.1 UNK10_U1.18
10_N16771181: 10_J22.1 UNK10_U1.17
10_N16771185: 10_J23.1 UNK10_U1.16
10_N16771189: 10_J24.1 UNK10_U1.20
10_N16771253: 10_J25.1 UNK10_U1.22
10_N16771332: UNK10_C35.2 UNK10_U1.8
10_N16771518: UNK10_C21.2 UNK10_U1.35
10_N16771899: UNK10_R12.2 UNK10_U1.10
10_N16772356: UNK10_C28.1 UNK10_U1.4 UNK10_Y1.1
10_N16772365: UNK10_C29.1 UNK10_U1.5 UNK10_Y1.3
10_N16774038: UNK10_C34.2 UNK10_U1.6
10_N16774061: UNK10_C31.2 UNK10_U1.25
10_N16775877: UNK10_C36.2 UNK10_L1.2 UNK10_U1.13
10_N16775955: UNK10_C36.1 UNK10_C37.1 UNK10_L2.2
10_N16775963: UNK10_L2.1 UNK10_U2.1
10_RESET: 10_J1.1 UNK10_C30.1 UNK10_R13.2 UNK10_U1.3
10_VB_RF: UNK10_C32.2 UNK10_C33.2 UNK10_L1.1 UNK10_U1.12 UNK10_U1.14
10_VCC_3V3: 10_J26.1 UNK10_C1.1 UNK10_C19.1 UNK10_C20.1 UNK10_R13.1 UNK10_U1.9 UNK10_U1.30
10_VREF: 10_J3.1 UNK10_C27.1 UNK10_U1.11
11_GND: 11_J27.1 UNK11_C1.2 UNK11_C19.2 UNK11_C20.2 UNK11_C21.1 UNK11_C27.2 UNK11_C28.2 UNK11_C29.2 UNK11_C30.2 UNK11_C31.1 UNK11_C32.1 UNK11_C33.1 UNK11_C34.1 UNK11_C35.1 UNK11_C37.2 UNK11_R12.1 UNK11_U1.21 UNK11_U1.39 UNK11_U1.41
11_N16770935: 11_J2.1 UNK11_U1.15
11_N16770957: 11_J4.1 UNK11_U1.24
11_N16770977: 11_J5.1 UNK11_U1.23
11_N16770981: 11_J6.1 UNK11_U1.2
11_N16771025: 11_J7.1 UNK11_U1.1
11_N16771029: 11_J8.1 UNK11_U1.40
11_N16771033: 11_J9.1 UNK11_U1.38
11_N16771037: 11_J10.1 UNK11_U1.37
11_N16771041: 11_J11.1 UNK11_U1.36
11_N16771045: 11_J12.1 UNK11_U1.34
11_N16771097: 11_J13.1 UNK11_U1.33
11_N16771101: 11_J14.1 UNK11_U1.32
11_N16771105: 11_J15.1 UNK11_U1.31
11_N16771109: 11_J16.1 UNK11_U1.29
11_N16771113: 11_J17.1 UNK11_U1.28
